# Altium PCB PCB_Project_PCB_V1I1.PcbDoc
Units mm, origin at the board's own origin, x right, y up, seen from the top; angles counter-clockwise.
Board outline 50 x 50 mm, 6 copper layers (L1, L2, L3, L4, L5, L6), stack 0.816 mm thick; 41 components, 27 nets, 119 pads, 86 vias.
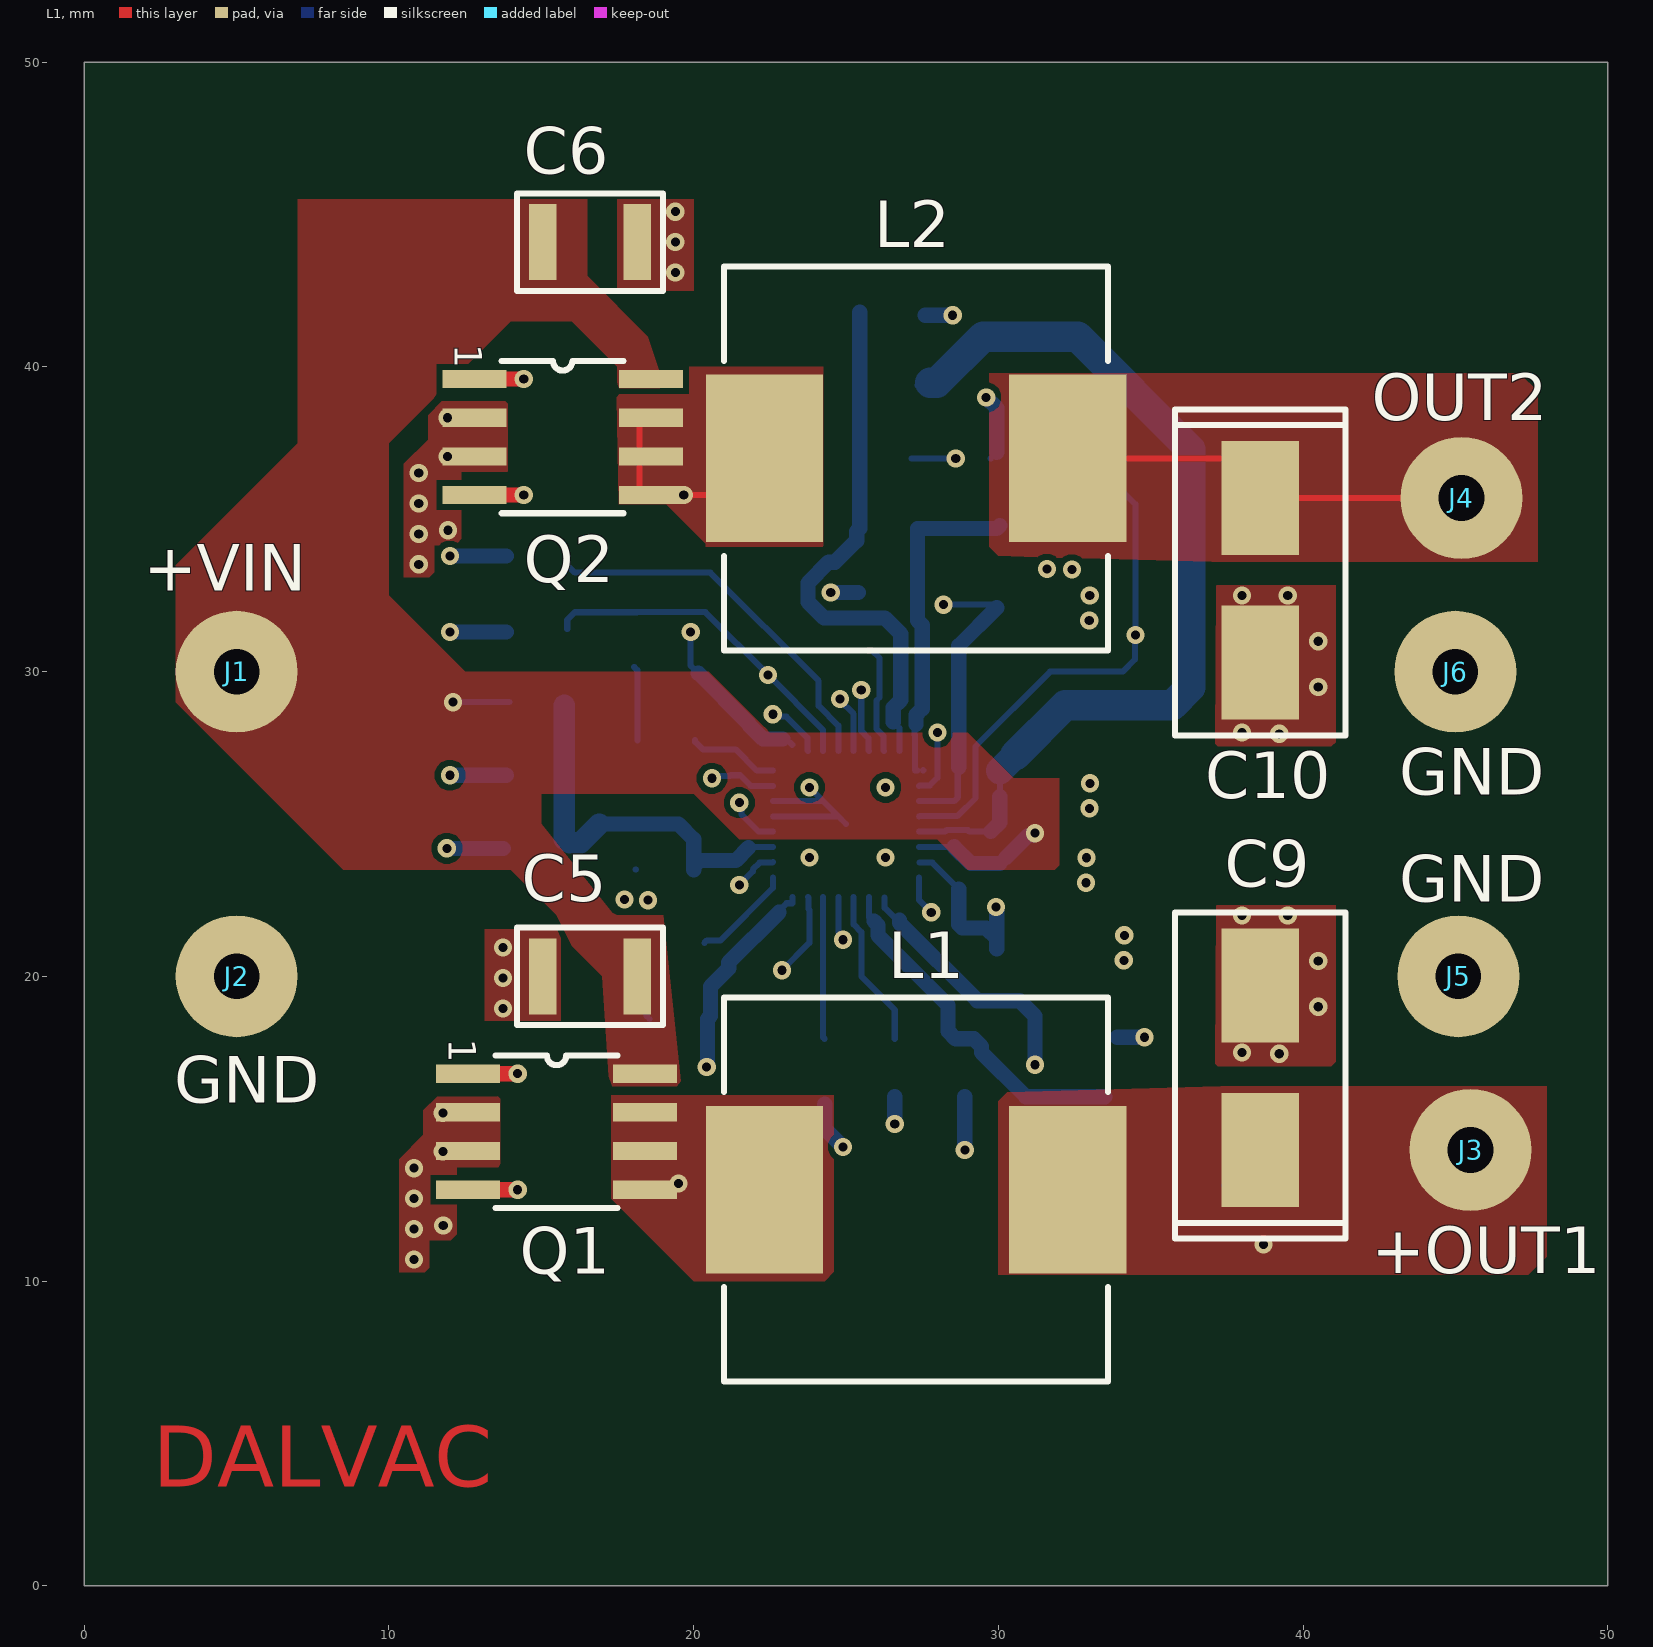
[diagram p0: L1 view]
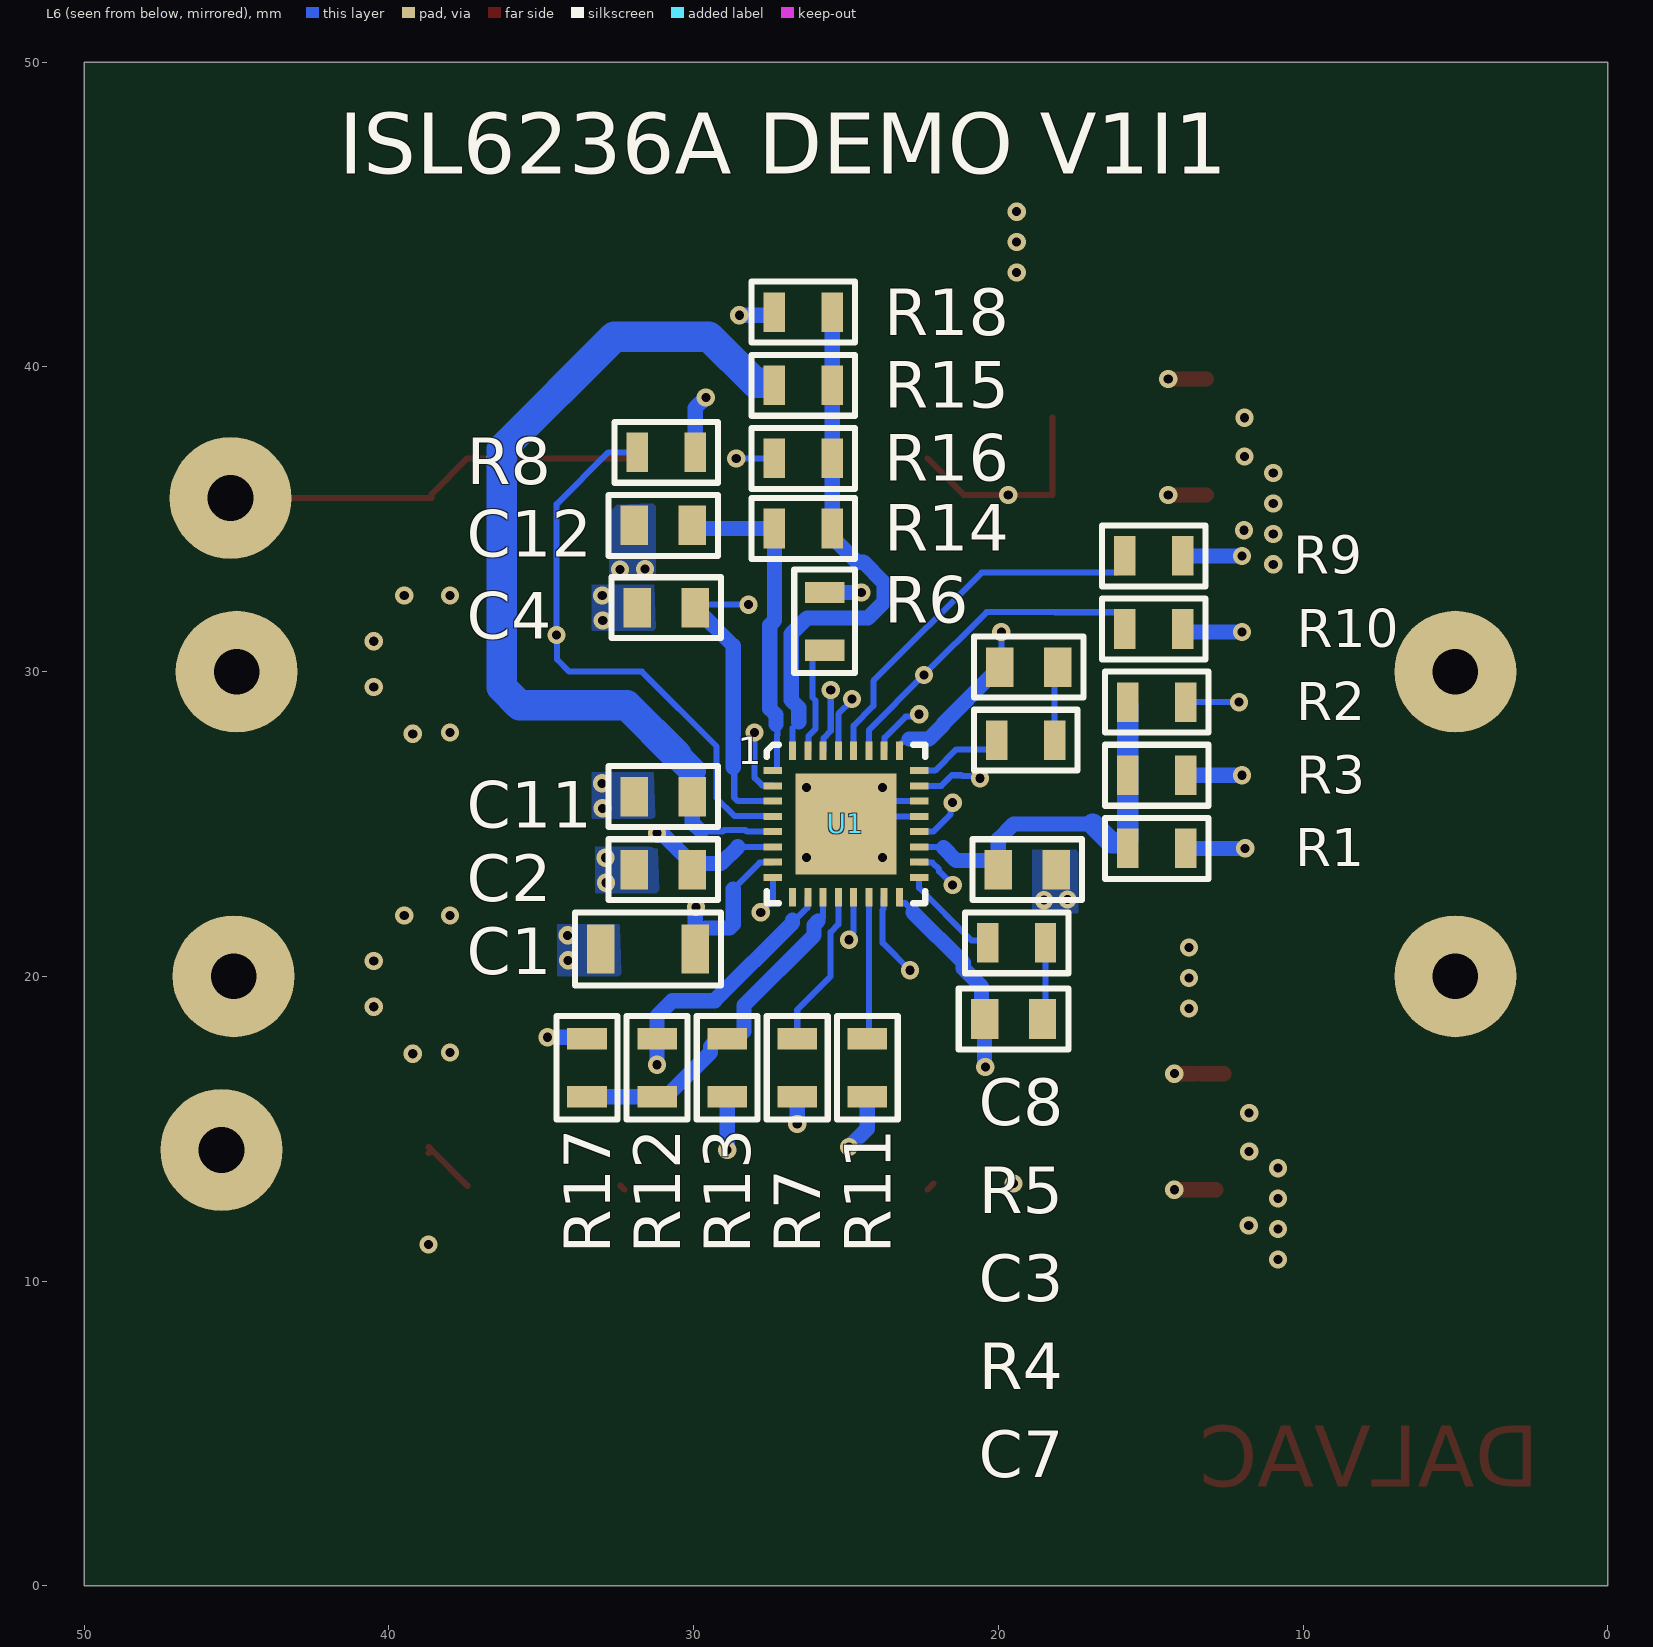
[diagram p1: L6 view, seen from below]
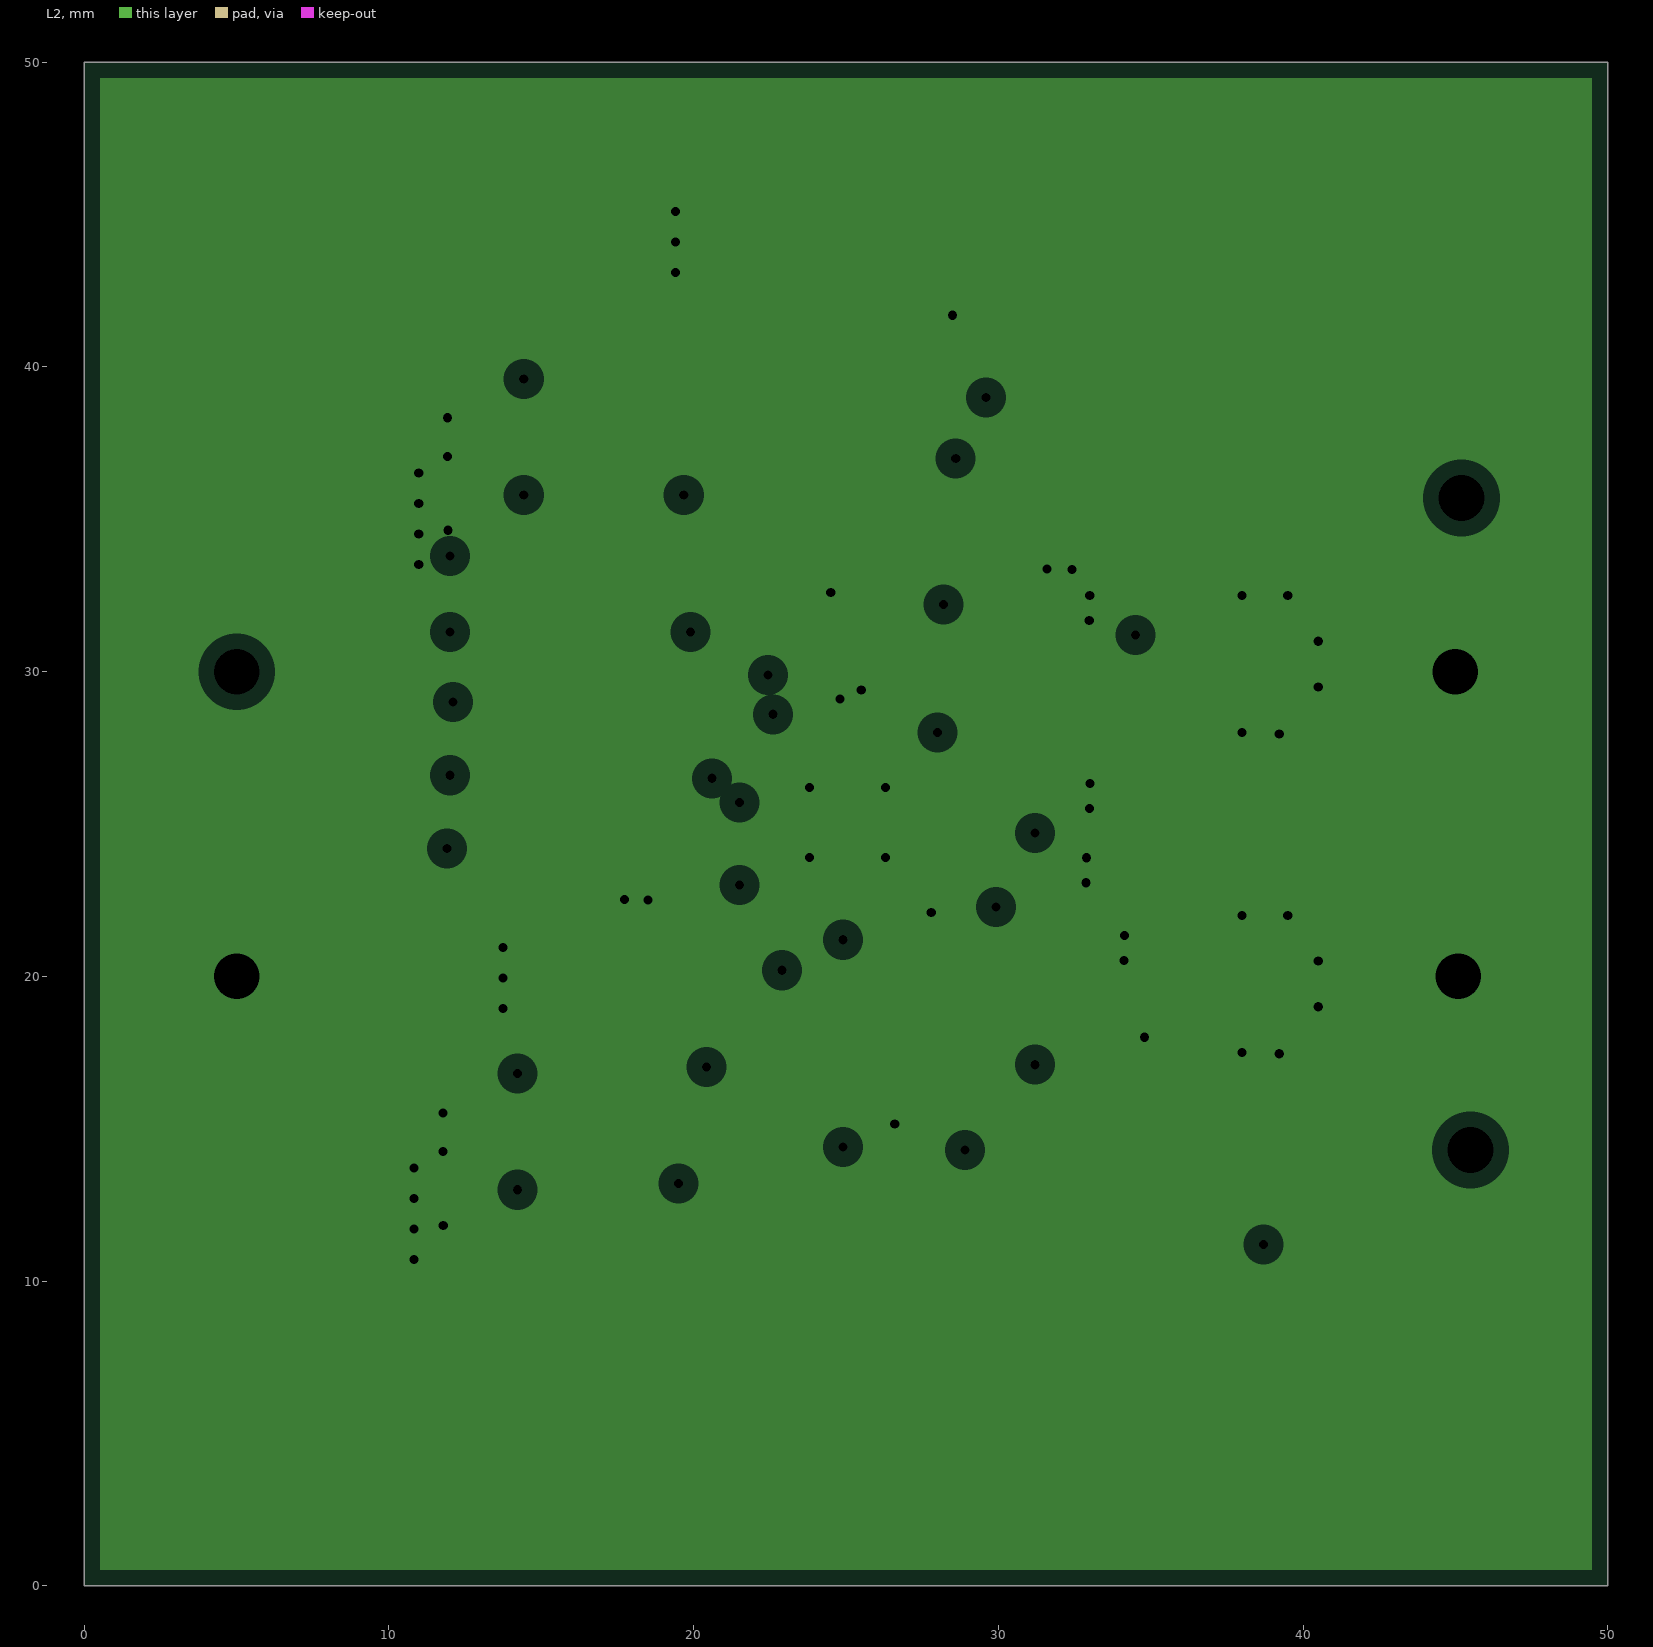
[diagram p2: L2, clearances drawn from the general rule]
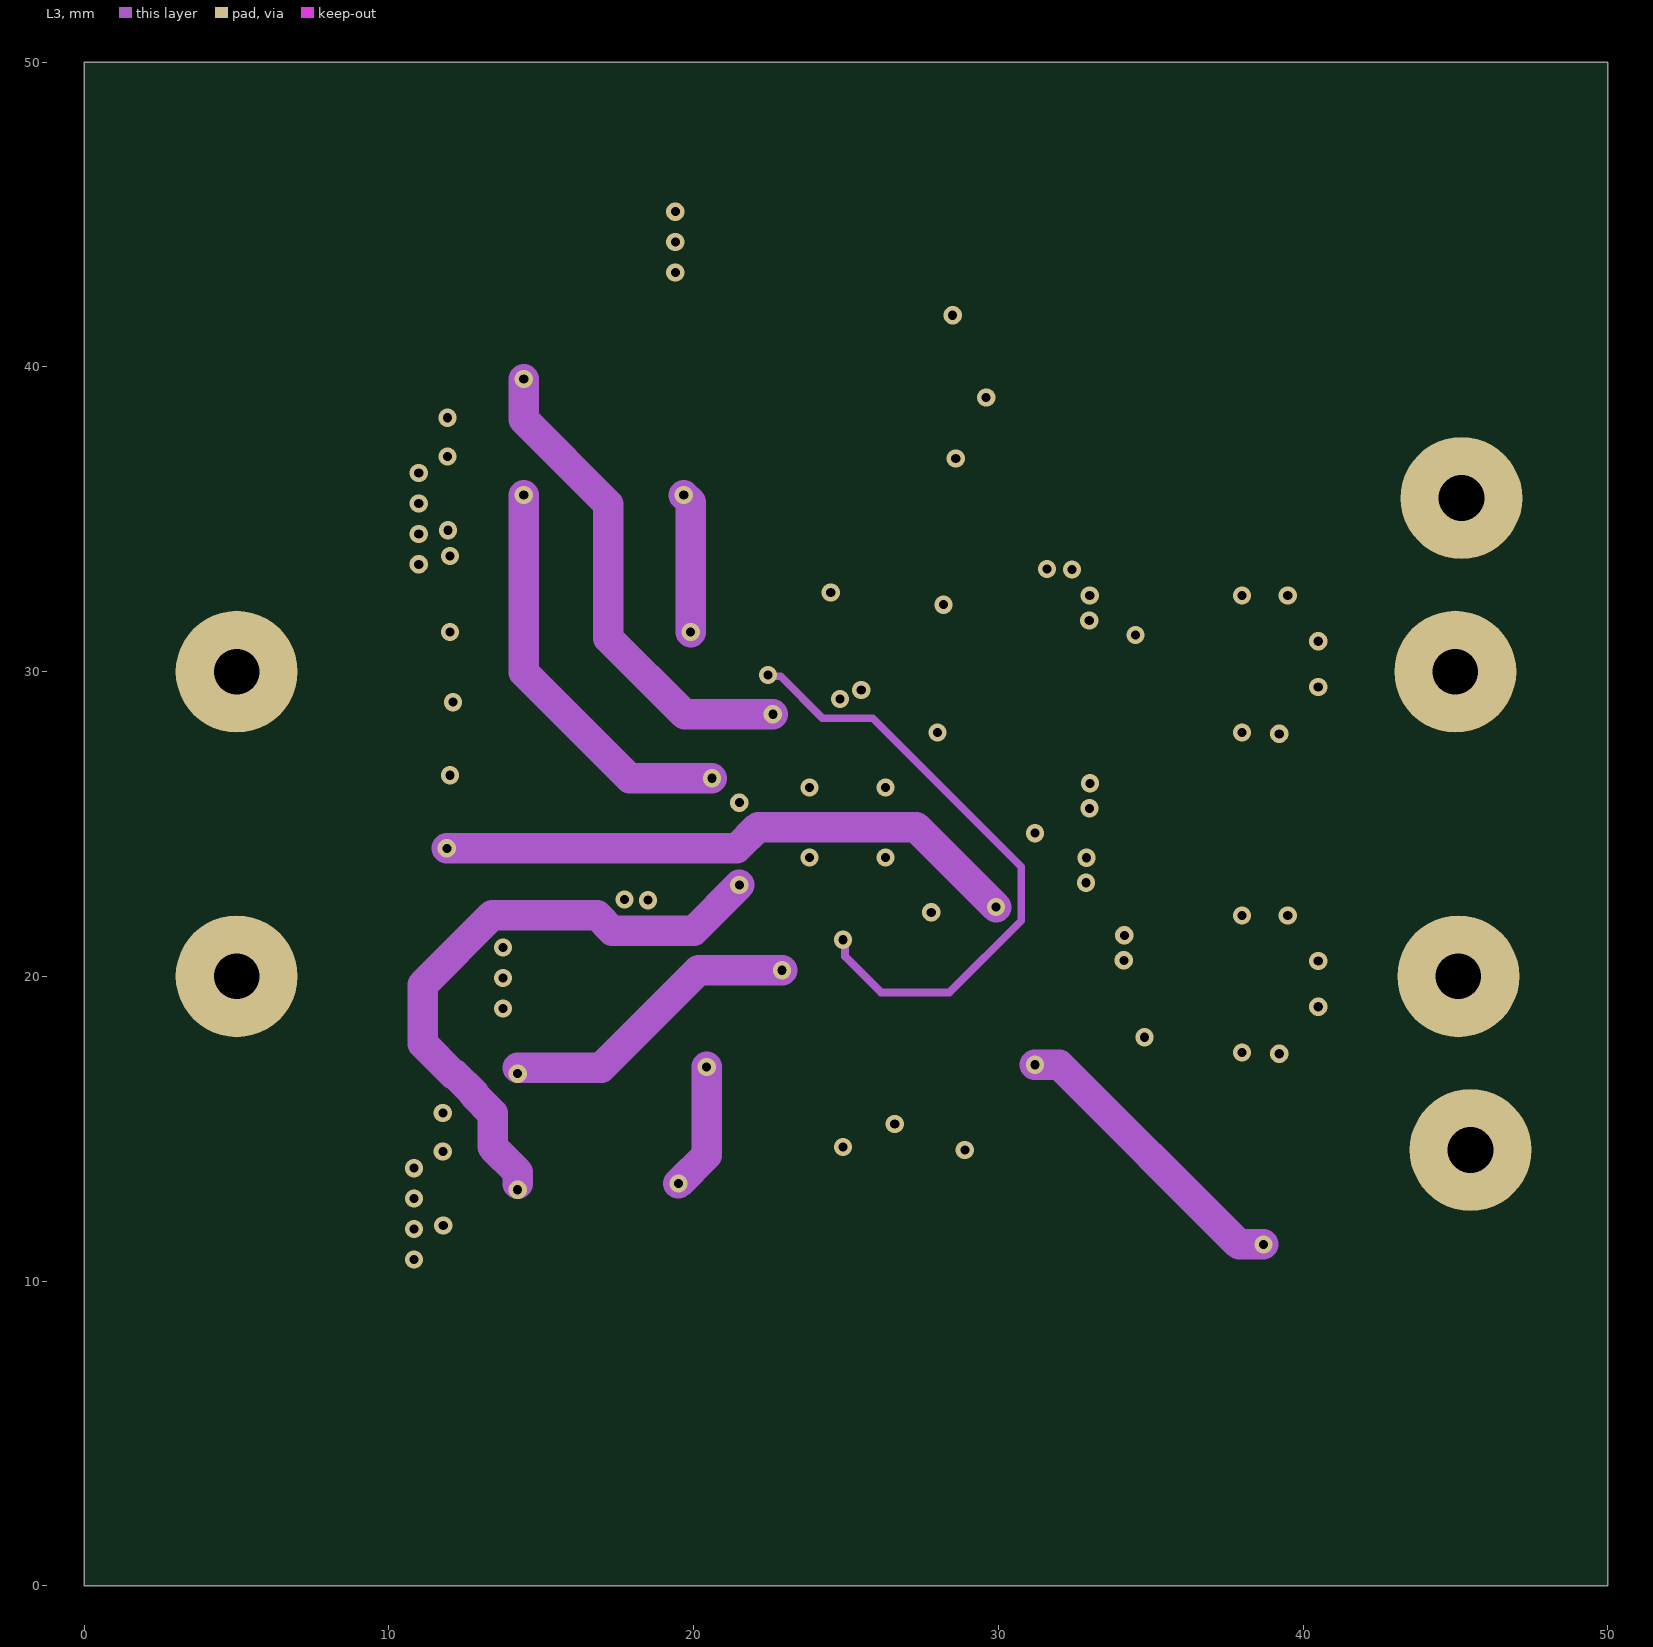
[diagram p3: L3]
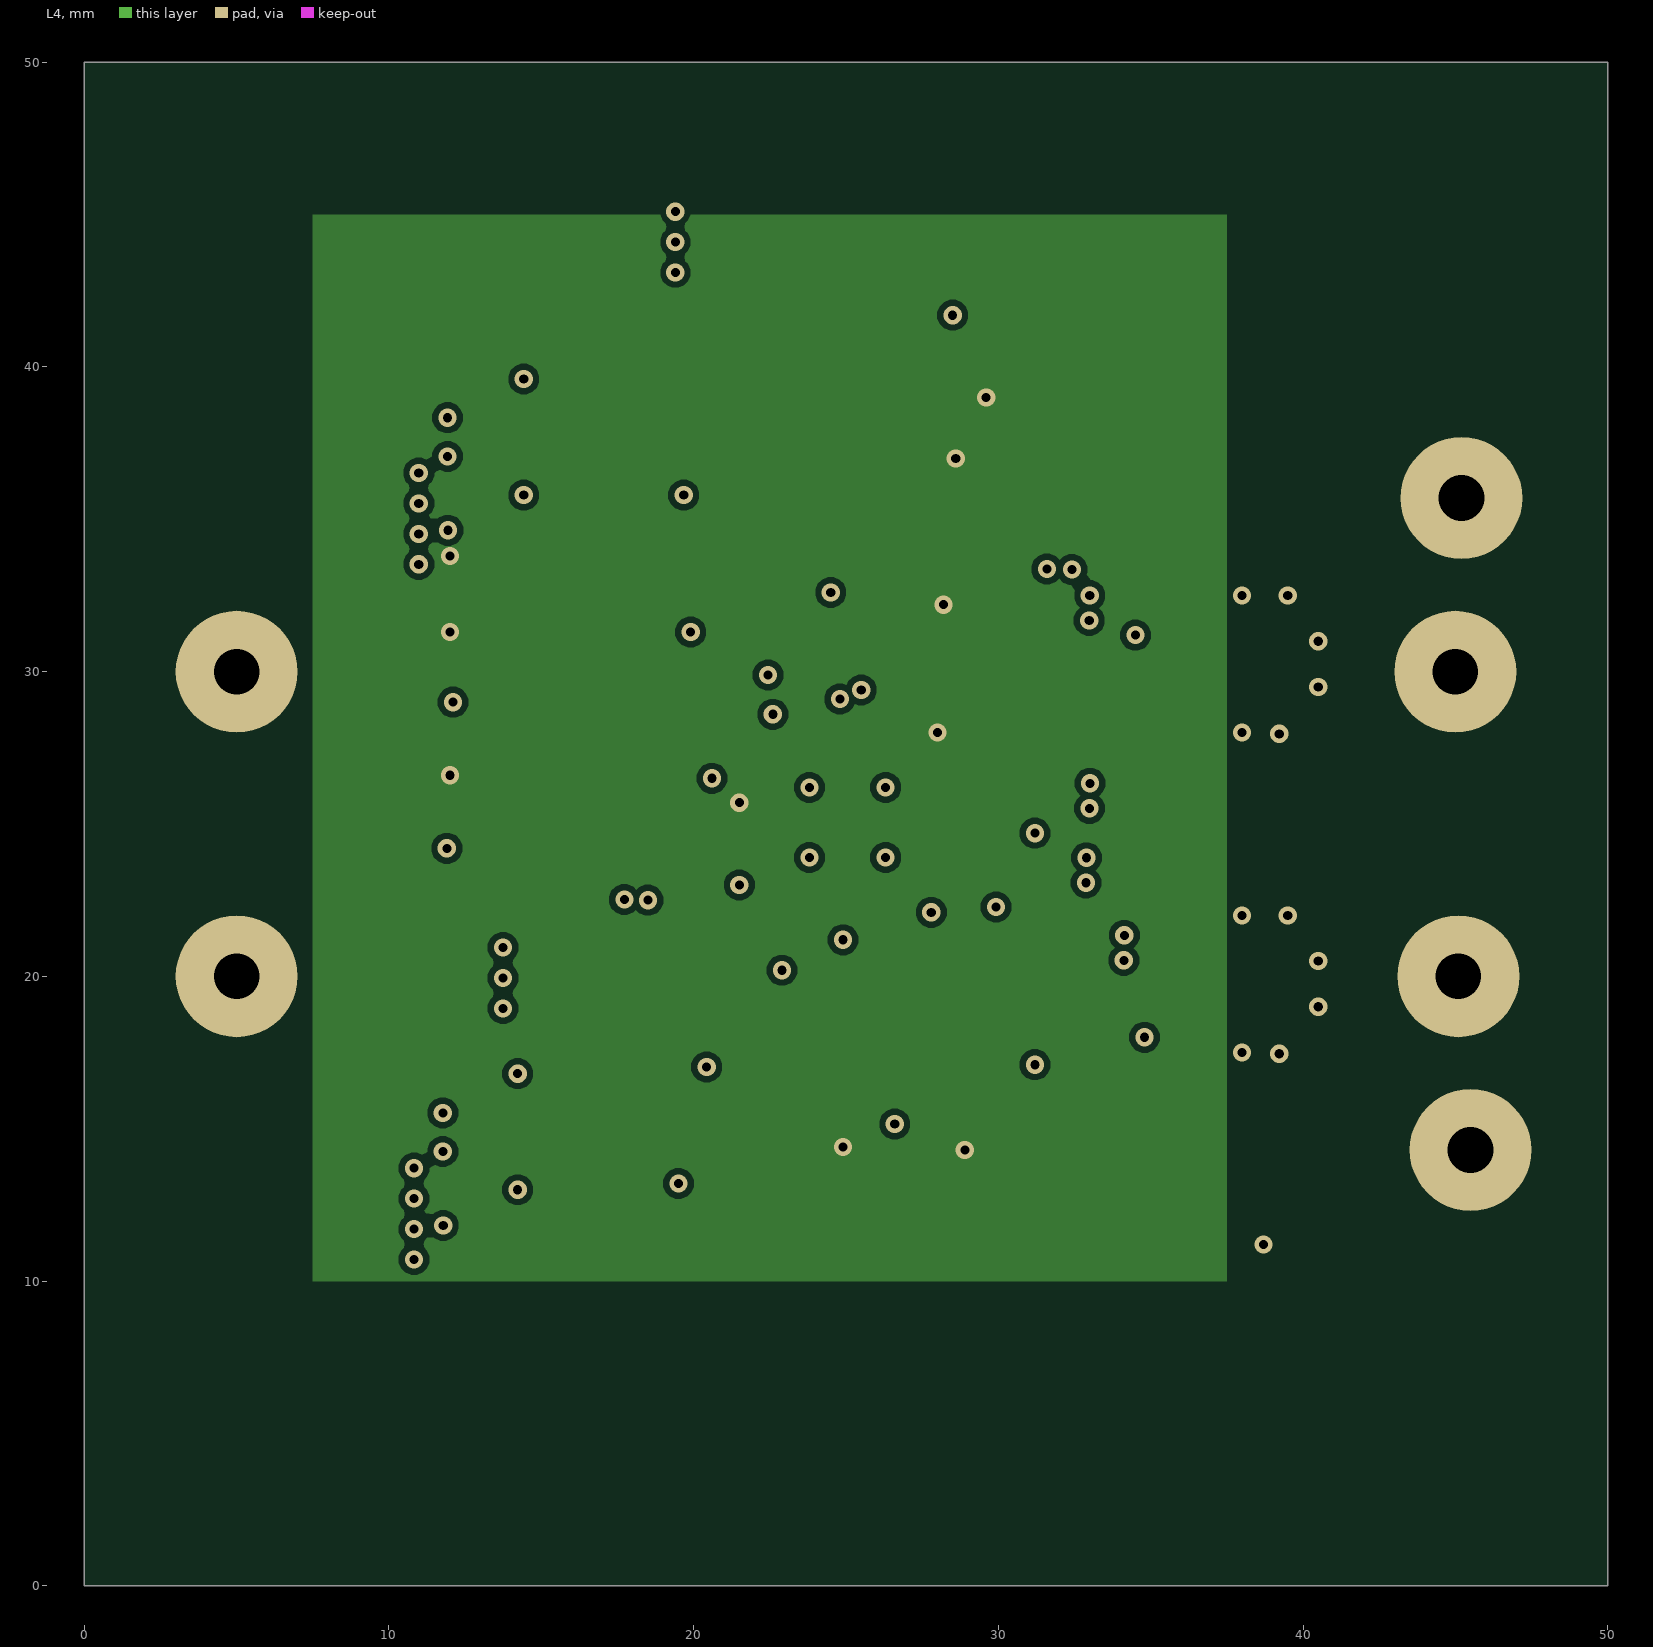
[diagram p4: L4]
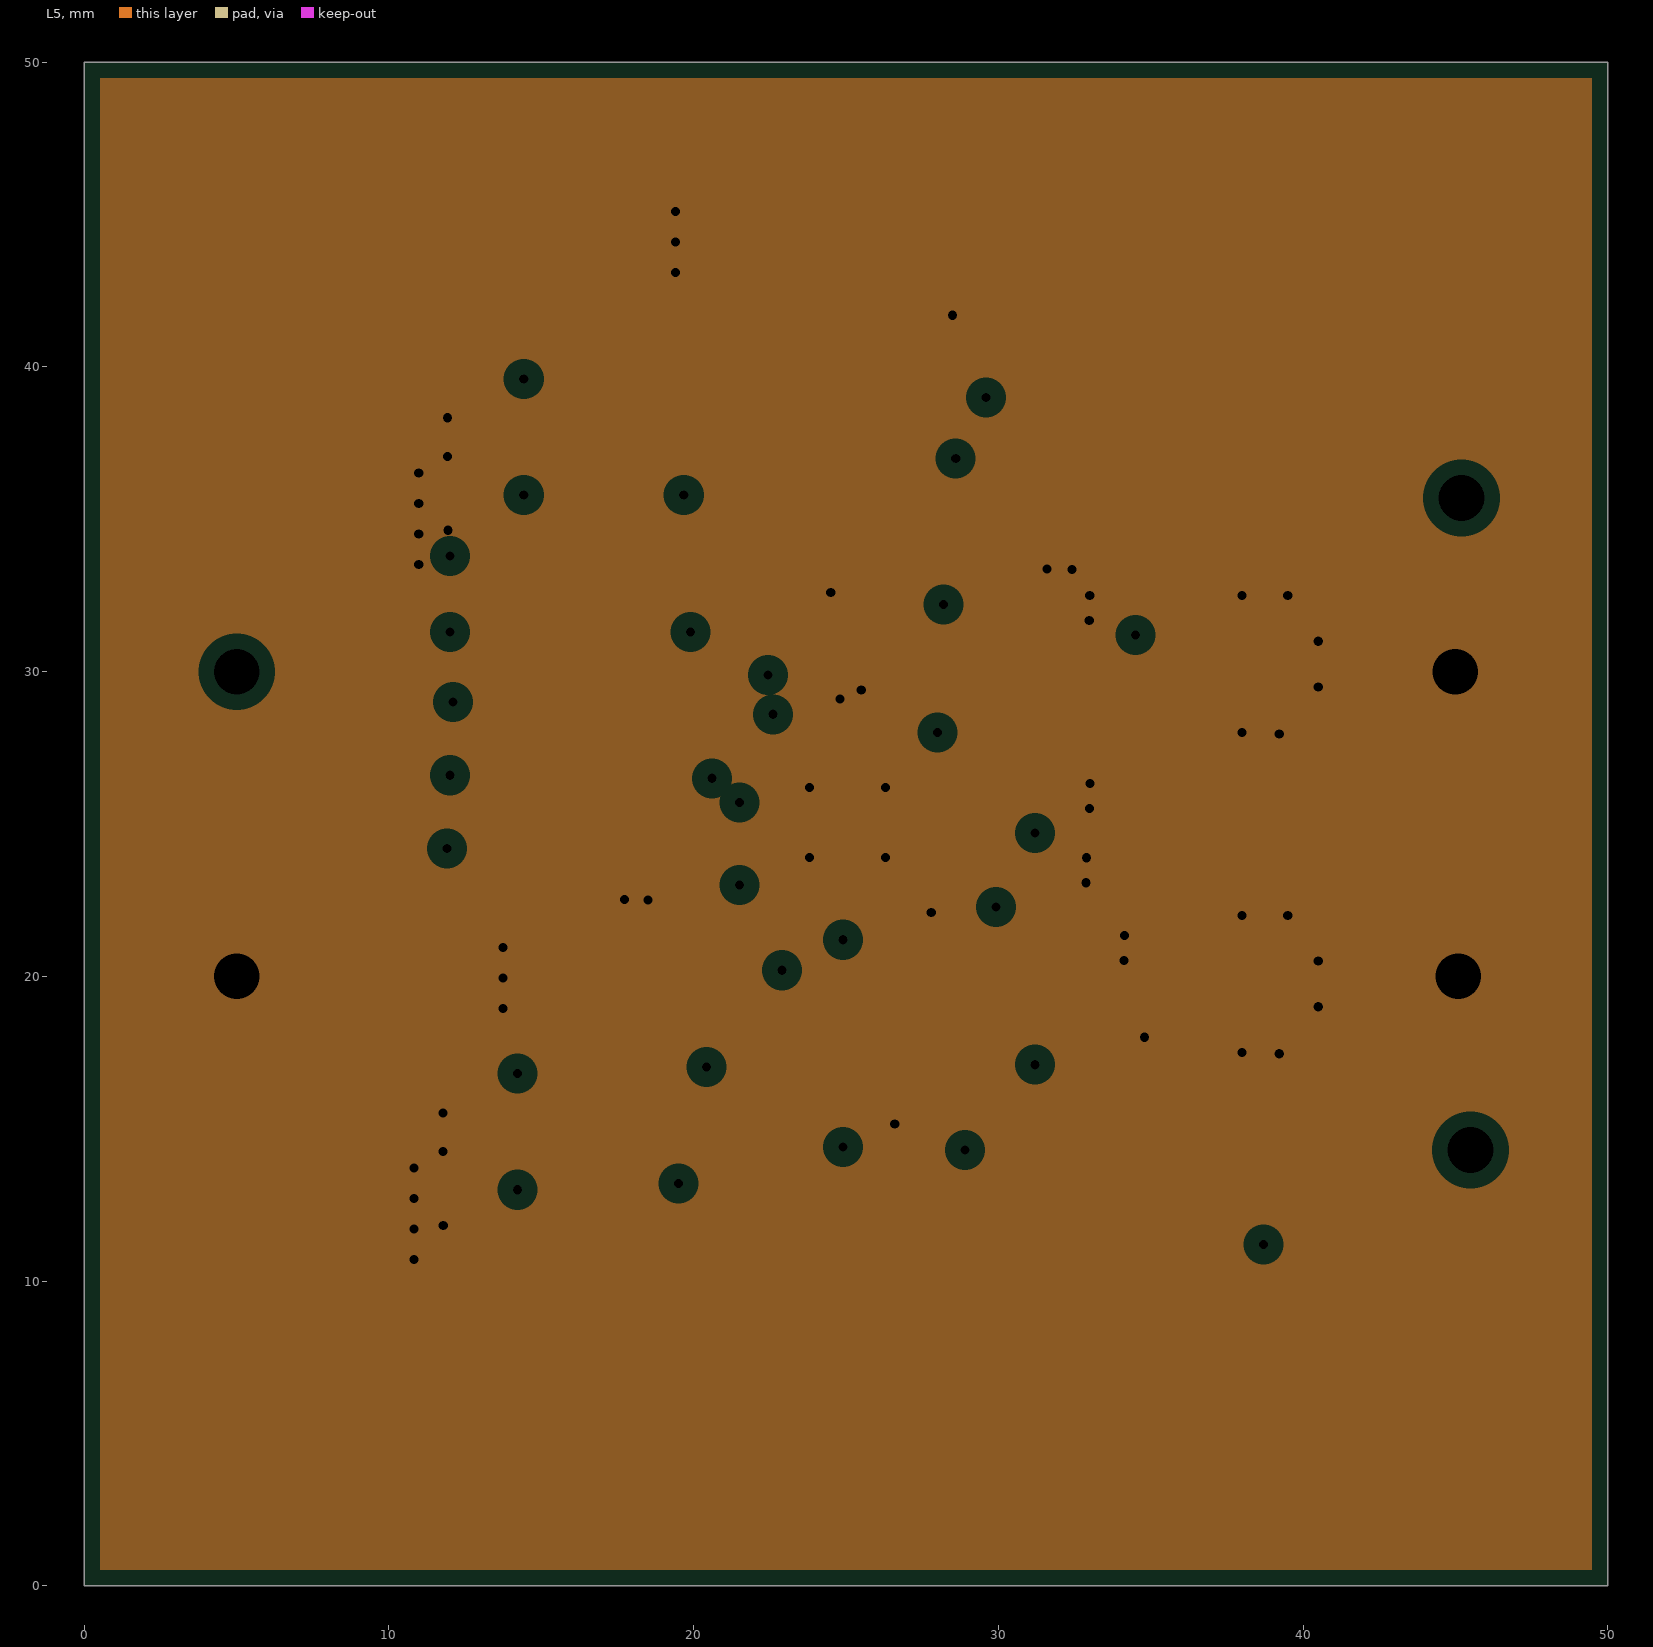
[diagram p5: L5, clearances drawn from the general rule]

## Layer stack, top to bottom
Top Solder: solder mask 0.0102, Solder Resist, Dk 3.5
L1: signal copper 0.0356
Dielectric 2: prepreg 0.0711, PP-006, Dk 4.1
L2: plane copper 0.035, net GND
Dielectric 3: prepreg 0.0711, PP-006, Dk 4.1
L3: signal copper 0.035
Dielectric 4: prepreg 0.0711, PP-006, Dk 4.1
L4: signal copper 0.035
Dielectric 5: prepreg 0.0711, PP-006, Dk 4.1
L5: plane copper 0.035, net GND
Dielectric 1: dielectric 0.32, FR-4, Dk 4.8
L6: signal copper 0.0356
Bottom Solder: solder mask 0.0102, Solder Resist, Dk 3.5

## Board outline
0,0 50,0 50,50 0,50

## Design rules (kind name [scope] priority, off if disabled: settings)
Clearance Clearance_1 [(ExistsOnLayer('L3') Or ExistsOnLayer('L4')) vs (ExistsOnLayer('L3') Or ExistsOnLayer('L4'))] p1: gap=0.2 ignorepadtopadclearanceinfootprint=FALSE sourcerule=38 cellrowname=All cellrowtype=0 cellcolname=All cellcoltype=0 innerlayers=TRUE
Clearance Clearance_2 [(ExistsOnLayer('L1') Or ExistsOnLayer('L6')) vs (ExistsOnLayer('L1') Or ExistsOnLayer('L6'))] p2: gap=0.2 ignorepadtopadclearanceinfootprint=FALSE sourcerule=38 cellrowname=All cellrowtype=0 cellcolname=All cellcoltype=0 outerlayers=TRUE
Clearance [All] p3: gap=0.254 ignorepadtopadclearanceinfootprint=FALSE ismatrix=TRUE
ComponentClearance [All] p1: gap=0.099 collisioncheckmode=3 verticalgap=0.099 showdistances=FALSE
DiffPairsRouting [All] p1: maxlimit=0.3 minlimit=0.2 mostfreqgap=0.2 toplayer_minwidth=0.381 toplayer_maxwidth=0.381 toplayer_prefwidth=0.381 midlayer1_minwidth=0.381 midlayer1_maxwidth=0.381 midlayer1_prefwidth=0.381 midlayer2_minwidth=0.381 midlayer2_maxwidth=0.381 midlayer2_prefwidth=0.381 bottomlayer_minwidth=0.381 bottomlayer_maxwidth=0.381 bottomlayer_prefwidth=0.381 maxuncoupledlength=12.7
MinimumSolderMaskSliver [All] p1: minsoldermaskwidth=0.1
PlaneClearance [All] p1: clearance=0.508
PlaneConnect [All] p1: pad.planeconnectstyle=Relief pad.reliefexpansion=0.508 pad.reliefentries=4 pad.reliefconductorwidth=1 pad.reliefairgap=0.5 via.planeconnectstyle=Direct via.reliefexpansion=0.508 via.reliefentries=4 via.reliefconductorwidth=0.254 via.reliefairgap=0.254
PolygonConnect [All] p1: connectstyle=Direct reliefconductorwidth=0.254 reliefentries=4 polygonreliefangle="90 Angle" airgapwidth=0.254
RoutingVias RoutingViaStyle_1 [All] p1: holewidth=0.3 width=0.6 viastyle="Through Hole" minholewidth=0.3 minwidth=0.6 maxholewidth=0.3 maxwidth=0.6
RoutingVias [All] p2: holewidth=0.711 width=1.27 viastyle="Through Hole" minholewidth=0.711 minwidth=1.27 maxholewidth=0.711 maxwidth=1.27
SilkToSolderMaskClearance [IsPad] p1: minsilkscreentomaskgap=0.1 clearancetoexposedcopper=TRUE
SolderMaskExpansion [All] p1: expansion=0.102 istentingtop=FALSE
Width MaxMinWidth_2 [InNet('UGATE2')] p1: maxlimit=10 minlimit=0.2 preferedwidth=0.2 minimp=50.000000 maximp=50.000000 favimp=50.000000
Width [All] p2: maxlimit=10 minlimit=0.2 preferedwidth=0.2 minimp=50.000000 maximp=50.000000 favimp=50.000000
24 further rules are at their usual default settings.

## Components (designator, comment, footprint, x,y, rotation, side; value= is the part's Value field where it differs from the comment)
C1 "4.7uF, 50V" C1206 31.5,20.9 r180 bottom value=4.7uF
C2 "1uF, 50V" C0805 31,23.5 r180 bottom value=1uF
C3 "1uF, 50V" C0805 19.05,23.5 r0 bottom value=1uF
C4 "1uF, 50V" C0805 30.9,32.1 r180 bottom value=1uF
C5 "10uF, 35V" C1210 16.6,20 r0 top value=10uF
C6 "10uF, 35V" C1210 16.6,44.1 r180 top value=10uF
C7 "100nF" C0805 19.5,18.6 r180 bottom
C8 "220nF" C0805 19,30.15 r0 bottom
C9 "330uF, 10V" 7343-43 38.6,17 r90 top value=330uF
C10 "330uF, 10V" 7343-43 38.6,33 r270 top value=330uF
C11 "10nF" C0805 31,25.9 r0 bottom
C12 "100nF" C0805 31,34.8 r0 bottom
J1 "4MMx1.5MM" PAD_WITH_HOLE_4MMx1MM5 5,30 r0 top
J2 "4MMx1.5MM" PAD_WITH_HOLE_4MMx1MM5 5,20 r0 top
J3 "4MMx1.5MM" PAD_WITH_HOLE_4MMx1MM5 45.5,14.3 r0 top
J4 "4MMx1.5MM" PAD_WITH_HOLE_4MMx1MM5 45.2,35.7 r0 top
J5 "4MMx1.5MM" PAD_WITH_HOLE_4MMx1MM5 45.1,20 r0 top
J6 "4MMx1.5MM" PAD_WITH_HOLE_4MMx1MM5 45,30 r0 top
L1 "3.3uH, DR125-3R3-R" DR125 27.3,13 r180 top
L2 "2.2uH" DR125 27.3,37 r0 top
Q1 "SI4816BDY-T1-E3" SO-8 15.5,14.9 r0 top
Q2 "SI4816BDY-T1-E3" SO-8 15.7,37.7 r0 top
R1 "0R" R0805 14.8,24.2 r180 bottom
R2 "0R" R0805 14.8,29 r0 bottom
R3 "10R" R0805 14.8,26.6 r180 bottom
R4 "1R" R0805 19.4,21.1 r0 bottom
R5 "1R" R0805 19.1,27.75 r180 bottom
R6 "200K" R0805 25.7,31.65 r90 bottom value=200kR
R7 "200K" R0805 26.6,17 r270 bottom value=200kR
R8 "10k" R0805 30.9,37.2 r180 bottom value=10kR
R9 "200K" R0805 14.9,33.8 r180 bottom value=200kR
R10 "200K" R0805 14.9,31.4 r180 bottom value=200kR
R11 "10k" R0805 24.3,17 r270 bottom value=10kR
R12 "DNP" R0805 31.2,17 r90 bottom
R13 "0R" R0805 28.9,17 r270 bottom
R14 "DNP" R0805 26.4,34.7 r0 bottom
R15 "0R" R0805 26.4,39.4 r0 bottom
R16 "DNP" R0805 26.4,37 r0 bottom
R17 "DNP" R0805 33.5,17 r270 bottom
R18 "DNP" R0805 26.4,41.8 r180 bottom
U1 "ISL6236AIRZ" L32.5x5B 25,25 r180 bottom

## Footprints (in the part's own frame and the unit in brackets; to place one, negate y for a bottom-side part, rotate by r counter-clockwise, add the part's x,y. Pads: shape width x height; smd on the part's side, far side on the other; paste and mask are expansions set on the pad)
7343-43 [mm]
  rect 3.75x2.55 smd: 1(-2.7,0) 2(2.7,0)
  silkscreen extent -5.6,-2.8 5.1,2.8
C0805 [mm]
  rect 0.9x1.3 smd: 1(-0.95,0) 2(0.95,0)
  silkscreen extent -1.8,-1 1.8,1
C1206 [mm]
  rect 0.9x1.6 smd: 1(-1.55,0) 2(1.55,0)
  silkscreen extent -2.4,-1.2 2.4,1.2
C1210 [mm]
  rect 0.9x2.5 smd: 1(-1.55,0) 2(1.55,0)
  silkscreen extent -2.4,-1.6 2.4,1.6
DR125 [mm]
  rect 3.85x5.5 smd: 1(-4.975,0) 2(4.975,0)
  silkscreen extent -6.3,-6.3 6.3,6.3
L32.5x5B [mm]
  rect 0.6x0.23 smd mask+0.051: 1(-2.4,1.75) 2(-2.4,1.25) 3(-2.4,0.75) 4(-2.4,0.25) 5(-2.4,-0.25) 6(-2.4,-0.75) 7(-2.4,-1.25) 8(-2.4,-1.75) 17(2.4,-1.75) 18(2.4,-1.25) 19(2.4,-0.75) 20(2.4,-0.25) 21(2.4,0.25) 22(2.4,0.75) 23(2.4,1.25) 24(2.4,1.75)
  rect 0.23x0.6 smd mask+0.051: 9(-1.75,-2.4) 10(-1.25,-2.4) 11(-0.75,-2.4) 12(-0.25,-2.4) 13(0.25,-2.4) 14(0.75,-2.4) 15(1.25,-2.4) 16(1.75,-2.4) 25(1.75,2.4) 26(1.25,2.4) 27(0.75,2.4) 28(0.25,2.4) 29(-0.25,2.4) 30(-0.75,2.4) 31(-1.25,2.4) 32(-1.75,2.4)
  rect 3.3x3.3 smd mask+0.051: 33(0,0)
  silkscreen extent -2.6,-2.6 2.6,2.6
PAD_WITH_HOLE_4MMx1MM5 [mm]
  round 4 hole 1.5: 1(0,0)
R0805 [mm]
  rect 0.7x1.3 smd: 1(-0.95,0) 2(0.95,0)
  silkscreen extent -1.7,-1 1.7,1
SO-8 [mm]
  rect 2.1x0.6 smd: 1(-2.9,1.905) 2(-2.9,0.635) 3(-2.9,-0.635) 4(-2.9,-1.905) 5(2.9,-1.905) 6(2.9,-0.635) 7(2.9,0.635) 8(2.9,1.905)
  silkscreen extent -2,-2.5 2,2.5

## Part data
C1: library part C3216X5R1H475K160AB, "Ceramic Capacitor, Multilayer, Ceramic, 50V, 10% +Tol, 10% -Tol, X5R, 15% TC, 4.7uF, Surface Mount, 1206", Capacitor Type=Ceramic, Case/Package=1206, Manufacturer=TDK, Max Operating Temperature=85°C, Min Operating Temperature=-55°C, Package Shape=Rectangular, Package Style=SMTMeter, Rated DC Voltage (URdc)=50V, Supplier Part Number=445-5994-1-ND, Temperature Characteristics Code=X5R, Tolerance  (fill in as +-)=10%, Category="Ceramic Capacitors", ComponentLink1Description=https://datasheet.ciiva.com:443/pdfs/VipMasterIC/IC/TDKC/TDKC-S-A0008796792/TDKC-S-A0008796792-1.pdf?src-supplier=IHS+Markit, ComponentLink1URL=https://datasheet.ciiva.com:443/pdfs/VipMasterIC/IC/TDKC/TDKC-S-A0008796792/TDKC-S-A0008796792-1.pdf?src-supplier=IHS+Markit, ComponentLink2Description=https://datasheet.ciiva.com/24216/c3216x5r1h475k160ab-265269-24216325.pdf?src-supplier=Mouser, ComponentLink2URL=https://datasheet.ciiva.com/24216/c3216x5r1h475k160ab-265269-24216325.pdf?src-supplier=Mouser, ComponentLink3Description=https://datasheet.ciiva.com/6286/tdkmlcccaprange-6286230.pdf?src-supplier=Digikey, ComponentLink3URL=https://datasheet.ciiva.com/6286/tdkmlcccaprange-6286230.pdf?src-supplier=Digikey, ComponentLink4Description=https://datasheet.ciiva.com/6286/tdkmlcccaprange-6286233.pdf?src-supplier=Digikey, ComponentLink4URL=https://datasheet.ciiva.com/6286/tdkmlcccaprange-6286233.pdf?src-supplier=Digikey, ComponentLink5Description=https://datasheet.ciiva.com/6286/tdkmlcccaprange-6286236.pdf?src-supplier=Digikey, ComponentLink5URL=https://datasheet.ciiva.com/6286/tdkmlcccaprange-6286236.pdf?src-supplier=Digikey, Dielectric Material=Ceramic, Height=1.6mm, JESD-609 Code=e3, Length=3.2mm, Manufacturer Part Number=C3216X5R1H475K160AB, Mounting Technology="Surface Mount", Multilayer=Yes, Packaging="Tape and Reel", Pins=2, Pricing="1=0.73, 10=0.514, 50=0.4326, 100=0.3523, 500=0.29356, 1000=0.2472 (USD)", Reach SVHC Compliant=Yes, RoHS=Yes, RoHS Compliant=Yes, Stock=61185, Supplier=Digikey, Terminal Finish=Nickel, Termination=Wraparound, Tolerance (fill in as +-)=10%, Width=1.6mm
C2 C3 C4: library part "C0805C105K5RACTU (2)", "Ceramic Capacitor, Multilayer, Ceramic, 50V, 10% +Tol, 10% -Tol, X7R, 15% TC, 1uF, Surface Mount, 0805", Capacitor Type=Ceramic, Case/Package=0805, Manufacturer=KEMET, Manufacturer Part Number=C0805C105K5RACTU, Max Operating Temperature=125°C, Min Operating Temperature=-55°C, Package Shape=Rectangular, Package Style=SMTMeter, Rated DC Voltage (URdc)=50V, Supplier Part Number=399-C0805C105K5RAC7800CT-ND, Temperature Characteristics Code=X7R, Tolerance  (fill in as +-)=10%, Category="Ceramic Capacitors", ComponentLink1Description=https://datasheet.ciiva.com:443/pdfs/VipMasterIC/IC/KEME/KEME-S-A0008991654/KEME-S-A0008991654-1.pdf?src-supplier=IHS+Markit, ComponentLink1URL=https://datasheet.ciiva.com:443/pdfs/VipMasterIC/IC/KEME/KEME-S-A0008991654/KEME-S-A0008991654-1.pdf?src-supplier=IHS+Markit, ComponentLink2Description=https://datasheet.ciiva.com/5408/kem-c1002-x7r-smd-5408569.pdf?src-supplier=Mouser, ComponentLink2URL=https://datasheet.ciiva.com/5408/kem-c1002-x7r-smd-5408569.pdf?src-supplier=Mouser, Dielectric Material=Ceramic, Height=1.25mm, JESD-609 Code=e3, Length=2mm, Mounting Technology="Surface Mount", Multilayer=Yes, Packaging="Tape and Reel", Pins=2, Pricing="1=0.35, 10=0.231, 50=0.1704, 100=0.1387, 500=0.10954, 1000=0.0925 (USD)", Reach SVHC Compliant=Yes, RoHS=Yes, RoHS Compliant=Yes, Stock=8085, Supplier=Digikey, Terminal Finish=Nickel, Termination=Wraparound, Tolerance (fill in as +-)=10%, Width=1.25mm
C5 C6: library part C1210C106K6PACTU, "Ceramic Capacitor, Multilayer, Ceramic, 35V, 10% +Tol, 10% -Tol, X5R, 15% TC, 10uF, Surface Mount, 1210", Capacitor Type=Ceramic, Case/Package=1210, Manufacturer=KEMET, Max Operating Temperature=85°C, Min Operating Temperature=-55°C, Package Shape=Rectangular, Rated DC Voltage (URdc)=35V, Supplier Part Number=399-12070-6-ND, Temperature Characteristics Code=X5R, Tolerance  (fill in as +-)=10%, Category="Ceramic Capacitors", ComponentLink1Description=https://search.kemet.com:443/component-edge/download/specsheet/C1210C106K6PACTU.pdf?src-supplier=IHS+Markit, ComponentLink1URL=https://search.kemet.com:443/component-edge/download/specsheet/C1210C106K6PACTU.pdf?src-supplier=IHS+Markit, ComponentLink2Description=http://www.farnell.com/datasheets/2741192.pdf?src-supplier=Farnell, ComponentLink2URL=http://www.farnell.com/datasheets/2741192.pdf?src-supplier=Farnell, ComponentLink3Description=http://www.alliedelec.com/m/d/f3c02ddb98afa3dd1adcb801109671e9.pdf?src-supplier=Allied+Electronics, ComponentLink3URL=http://www.alliedelec.com/m/d/f3c02ddb98afa3dd1adcb801109671e9.pdf?src-supplier=Allied+Electronics, ComponentLink4Description=https://datasheet.octopart.com/C1210C106K6PACTU-KEMET-datasheet-83562113.pdf?src-supplier=Newark, ComponentLink4URL=https://datasheet.octopart.com/C1210C106K6PACTU-KEMET-datasheet-83562113.pdf?src-supplier=Newark, ComponentLink5Description=https://api.kemet.com/component-edge/download/datasheet/C1210C106K6PAC7800.pdf?src-supplier=Digikey, ComponentLink5URL=https://api.kemet.com/component-edge/download/datasheet/C1210C106K6PAC7800.pdf?src-supplier=Digikey, ComponentLink6Description=http://www.kemet.com/docfinder?Partnumber=C1210C106K6PAC7800&src-supplier=Digikey, ComponentLink6URL=http://www.kemet.com/docfinder?Partnumber=C1210C106K6PAC7800&src-supplier=Digikey, ComponentLink7Description=http://www.farnell.com/datasheets/2741192.pdf?src-supplier=Newark, ComponentLink7URL=http://www.farnell.com/datasheets/2741192.pdf?src-supplier=Newark, ComponentLink8Description=https://datasheet.octopart.com/C1210C106K6PACTU-KEMET-datasheet-86448939.pdf?src-supplier=Farnell, ComponentLink8URL=https://datasheet.octopart.com/C1210C106K6PACTU-KEMET-datasheet-86448939.pdf?src-supplier=Farnell, Dielectric Material=Ceramic, JESD-609 Code=e3, Manufacturer Part Number=C1210C106K6PACTU, Mounting Technology="Surface Mount", Multilayer=Yes, Packaging="Tape and Reel", Pins=2, Pricing="1=0.72, 10=0.503, 50=0.424, 100=0.3452, 500=0.28766 (USD)", Reach SVHC Compliant=Yes, RoHS=Yes, RoHS Compliant=Yes, Stock=28075, Supplier=Digikey, Terminal Finish=Nickel, Termination=Wraparound, Tolerance (fill in as +-)=10%
C7 C12: library part C0805C104K5RAC7800, "Multilayer Ceramic Capacitor, 0.1 uF, 50 V, ± 10%, X7R, 0805 [2012 Metric]", Manufacturer=KEMET, Supplier Part Number=399-C0805C104K5RAC7800CT-ND, ComponentLink1Description=https://datasheet.octopart.com/C0805C104K5RACTU-KEMET-datasheet-101576148.pdf?src-supplier=Farnell, ComponentLink1URL=https://datasheet.octopart.com/C0805C104K5RACTU-KEMET-datasheet-101576148.pdf?src-supplier=Farnell, ComponentLink2Description=https://datasheet.octopart.com/C0805C104K5RAC-TU-Kemet-datasheet-32036385.pdf?src-supplier=Element14, ComponentLink2URL=https://datasheet.octopart.com/C0805C104K5RAC-TU-Kemet-datasheet-32036385.pdf?src-supplier=Element14, Manufacturer Part Number=C0805C104K5RAC7800, Pricing="1=0.14, 10=0.091, 50=0.0546, 100=0.043, 500=0.03172, 1000=0.02627 (USD)", RoHS=No, Stock=2139377, Supplier=Digikey
C8: library part C0805C224K5RACTU, "Ceramic Capacitor, Multilayer, Ceramic, 50V, 10% +Tol, 10% -Tol, X7R, 15% TC, 0.22uF, Surface Mount, 0805", Capacitor Type=Ceramic, Case/Package=0805, Manufacturer=KEMET, Max Operating Temperature=125°C, Min Operating Temperature=-55°C, Package Shape=Rectangular, Package Style=SMTMeter, Rated DC Voltage (URdc)=50V, Supplier Part Number=399-C0805C224K5RACTUCT-ND, Temperature Characteristics Code=X7R, Tolerance  (fill in as +-)=10%, Category="Ceramic Capacitors", ComponentLink1Description=https://datasheet.ciiva.com:443/pdfs/VipMasterIC/IC/KEME/KEME-S-A0008991654/KEME-S-A0008991654-1.pdf?src-supplier=IHS+Markit, ComponentLink1URL=https://datasheet.ciiva.com:443/pdfs/VipMasterIC/IC/KEME/KEME-S-A0008991654/KEME-S-A0008991654-1.pdf?src-supplier=IHS+Markit, ComponentLink2Description=https://datasheet.ciiva.com/7842/kem-c1002-x7r-smd-7842582.pdf?src-supplier=Element14, ComponentLink2URL=https://datasheet.ciiva.com/7842/kem-c1002-x7r-smd-7842582.pdf?src-supplier=Element14, ComponentLink3Description=https://datasheet.ciiva.com/28682/1851736-28682316.pdf?src-supplier=Element14, ComponentLink3URL=https://datasheet.ciiva.com/28682/1851736-28682316.pdf?src-supplier=Element14, Dielectric Material=Ceramic, Height=1.25mm, JESD-609 Code=e3, Length=2mm, Manufacturer Part Number=C0805C224K5RACTU, Mounting Technology="Surface Mount", Multilayer=Yes, Packaging="Tape and Reel", Pins=2, Pricing="1=0.16, 10=0.106, 50=0.063, 100=0.0496, 500=0.03666, 1000=0.03035 (USD)", Reach SVHC Compliant=Yes, RoHS=Yes, RoHS Compliant=Yes, Stock=7210, Supplier=Digikey, Terminal Finish=Nickel, Termination=Wraparound, Tolerance (fill in as +-)=10%, Width=1.25mm
C9 C10: library part T530X337M010ATE004, "Tantalum Capacitor, Polarized, Tantalum (solid Polymer), 10V, 20% +Tol, 20% -Tol, 330uF, Surface Mount, 2917", Capacitor Type=Tantalum, Case/Package=2917, Dielectric Material=Polymer, ESR (Equivalent Series Resistance)=4mR, Leakage Current=330uA, Manufacturer=KEMET, Max Operating Temperature=125°C, Min Operating Temperature=-55°C, Package Shape=Rectangular, Package Style=SMTMeter, Rated DC Voltage (URdc)=10V, Ripple Current=8.2A, Supplier Part Number=399-10378-1-ND, Tolerance  (fill in as +-)=20%, Category="Polymer Capacitors", ComponentLink1Description=https://datasheet.ciiva.com:443/pdfs/VipMasterIC/IC/KEME/KEME-S-A0009782340/KEME-S-A0009782340-1.pdf?src-supplier=IHS+Markit, ComponentLink1URL=https://datasheet.ciiva.com:443/pdfs/VipMasterIC/IC/KEME/KEME-S-A0009782340/KEME-S-A0009782340-1.pdf?src-supplier=IHS+Markit, ComponentLink2Description=https://datasheet.ciiva.com/11794/0900766b80deaa91-11794477.pdf?src-supplier=Rs, ComponentLink2URL=https://datasheet.ciiva.com/11794/0900766b80deaa91-11794477.pdf?src-supplier=Rs, ComponentLink3Description=https://datasheet.ciiva.com/14593/70096008-14593753.pdf?src-supplier=Allied+Electronics, ComponentLink3URL=https://datasheet.ciiva.com/14593/70096008-14593753.pdf?src-supplier=Allied+Electronics, Height=4mm, JESD-609 Code=e3, Length=7.3mm, Manufacturer Part Number=T530X337M010ATE004, Mounting Technology="Surface Mount", Packaging="Tape and Reel", Pins=2, Polarity=Polarized, Pricing="1=7.14, 10=6.191, 50=5.5562, 100=4.8259 (USD)", Reach SVHC Compliant=Yes, RoHS=Yes, RoHS Compliant=Yes, Stock=3973, Supplier=Digikey, Tan Delta=0.08, Terminal Finish=Tin, Termination="J BEND", Tolerance (fill in as +-)=20%, Width=4.3mm
C11: library part C0805F103K5RACTU, "Ceramic Capacitor, Ceramic, 50V, 10% +Tol, 10% -Tol, X7R, -/+15ppm/Cel TC, 0.01uF, 0805", Capacitor Type=Ceramic, Case/Package=0805, Manufacturer=KEMET, Max Operating Temperature=125°C, Min Operating Temperature=-55°C, Package Style=SMTMeter, Rated DC Voltage (URdc)=50V, Supplier Part Number=399-C0805F103K5RAC7800CT-ND, Temperature Characteristics Code=X7R, Tolerance  (fill in as +-)=10%, Category="Ceramic Capacitors", ComponentLink1Description=https://datasheet.ciiva.com:443/pdfs/VipMasterIC/IC/KEME/KEMES00768/KEMES00768-1.pdf?src-supplier=IHS+Markit, ComponentLink1URL=https://datasheet.ciiva.com:443/pdfs/VipMasterIC/IC/KEME/KEMES00768/KEMES00768-1.pdf?src-supplier=IHS+Markit, ComponentLink2Description=https://datasheet.ciiva.com/146/docfinderpartnumber-c0805f103k5ractu-146278.pdf?src-supplier=Digikey, ComponentLink2URL=https://datasheet.ciiva.com/146/docfinderpartnumber-c0805f103k5ractu-146278.pdf?src-supplier=Digikey, ComponentLink3Description=https://datasheet.ciiva.com/7842/48829-7842408.pdf?src-supplier=Element14, ComponentLink3URL=https://datasheet.ciiva.com/7842/48829-7842408.pdf?src-supplier=Element14, ComponentLink4Description=https://datasheet.ciiva.com/7842/48829-7842407.pdf?src-supplier=Element14, ComponentLink4URL=https://datasheet.ciiva.com/7842/48829-7842407.pdf?src-supplier=Element14, Dielectric Material=Ceramic, Height=0.9mm, JESD-609 Code=e3, Length=2mm, Manufacturer Part Number=C0805F103K5RACTU, Packaging="Tape and Reel", Pins=2, Pricing="1=0.35, 10=0.225, 50=0.158, 100=0.1276, 500=0.09478, 1000=0.08293 (USD)", Reach SVHC Compliant=Yes, RoHS=Yes, RoHS Compliant=Yes, Stock=10399, Supplier=Digikey, Terminal Finish=Nickel, Tolerance (fill in as +-)=10%, Width=1.25mm
J1 J2 J3 J4 J5 J6: library part PAD_WITH_HOLE_4MMx1MM5, "Pad with a hole 4mm x 1.5mm"
L1: library part DR125-3R3-R, "Inductor Power Shielded Drum Core 3.3uH 20% 100KHz Ferrite 9.26A 6.3mOhm DCR T/R", Manufacturer="Eaton Cooper", Supplier Part Number=513-1529-1-ND, Category="Fixed Inductors", Manufacturer Part Number=DR125-3R3-R, Pricing="1=1.21, 10=1.02, 25=0.9276, 50=0.8718, 100=0.7234, 250=0.66776 (USD)", RoHS=Yes, Stock=27706, Supplier=Digikey
L2: library part DR125-2R2-R, "General Purpose Inductor, 2.2uH, 20%, 1 Element, Ferrite-Core, SMD, 4949", Case/Size Code=4949, DC Resistance (DCR)=4.5mR, Inductor Application="DC-DC CONVERTER", Inductor Type="GENERAL PURPOSE INDUCTOR", Manufacturer="Eaton Cooper", Max Current Rating=10.9A, Max Operating Temperature=125°C, Min Operating Temperature=-40°C, Package Height=6mm, Package Length=12.5mm, Package Style=SMTMeter, Supplier Part Number=513-1662-1-ND, Test Frequency=100kHz, Tolerance=20%, Category="Fixed Inductors", Channels=1, ComponentLink1Description=https://datasheet.ciiva.com:443/pdfs/VipMasterIC/IC/ETON/ETON-S-A0008372465/ETON-S-A0008372465-1.pdf?src-supplier=IHS+Markit, ComponentLink1URL=https://datasheet.ciiva.com:443/pdfs/VipMasterIC/IC/ETON/ETON-S-A0008372465/ETON-S-A0008372465-1.pdf?src-supplier=IHS+Markit, ComponentLink2Description=https://datasheet.ciiva.com/14667/0900766b8116a153-14667792.pdf?src-supplier=Rs, ComponentLink2URL=https://datasheet.ciiva.com/14667/0900766b8116a153-14667792.pdf?src-supplier=Rs, ComponentLink3Description=https://datasheet.ciiva.com/26926/getdatasheetpartid-571249-26926912.pdf?src-supplier=Verical, ComponentLink3URL=https://datasheet.ciiva.com/26926/getdatasheetpartid-571249-26926912.pdf?src-supplier=Verical, ComponentLink4Description=https://datasheet.ciiva.com/8004/87246-8004874.pdf?src-supplier=Element14, ComponentLink4URL=https://datasheet.ciiva.com/8004/87246-8004874.pdf?src-supplier=Element14, Construction="Magnetic Shielded", Core Material=Ferrite, Inductance-Nom (L)=2.2uH, JESD-609 Code=e3, Manufacturer Part Number=DR125-2R2-R, Package Width=12.5mm, Packaging="Tape and Reel", Pins=2, Pricing="1=1.21, 10=1.02, 25=0.9276, 50=0.8718, 100=0.7234, 250=0.6678 (USD)", Reach SVHC Compliant=Yes, RoHS=Yes, RoHS Compliant=Yes, Shape/Size Description="RECTANGULAR PACKAGE", Shielding=Shielded, Stock=2132, Supplier=Digikey, Surface Mount=Yes, Terminal Finish=Nickel, Terminal Placement="Dual Ended", Termination="One Surface"
Q1 Q2: "Small Signal Field-Effect Transistor, 5.8A I(D), 30V, 2-Element, N-Channel, Silicon, Metal-oxide Semiconductor FET", Drain Current-Max (ID)=5.8A, Drain-source On Resistance-Max=18.5mR, DS Breakdown Voltage-Min=30V, Manufacturer="Vishay Siliconix", Max Operating Temperature=150°C, Operating Mode="ENHANCEMENT MODE", Package Body Material=Plastic, Package Shape=Rectangular, Package Style="SMALL OUTLINEMeter", Peak Reflow Temperature (Cel)=260°C, Supplier Part Number=SI4816BDY-T1-E3DKR-ND, Time @ Peak Reflow Temperature-Max (s)=40s, Category=MOSFETs, ComponentLink1Description=https://datasheet.ciiva.com:443/pdfs/VipMasterIC/IC/SILX/SILXS27103/SILXS25943-1.pdf?src-supplier=IHS+Markit, ComponentLink1URL=https://datasheet.ciiva.com:443/pdfs/VipMasterIC/IC/SILX/SILXS27103/SILXS25943-1.pdf?src-supplier=IHS+Markit, ComponentLink2Description=https://datasheet.ciiva.com/7710/si4816bd-7710449.pdf?src-supplier=Element14, ComponentLink2URL=https://datasheet.ciiva.com/7710/si4816bd-7710449.pdf?src-supplier=Element14, ComponentLink3Description=https://datasheet.ciiva.com/928/si4816bd-928458.pdf?src-supplier=Digikey, ComponentLink3URL=https://datasheet.ciiva.com/928/si4816bd-928458.pdf?src-supplier=Digikey, ComponentLink4Description=https://datasheet.ciiva.com/928/si4816bd-928459.pdf?src-supplier=Digikey, ComponentLink4URL=https://datasheet.ciiva.com/928/si4816bd-928459.pdf?src-supplier=Digikey, ComponentLink5Description=https://datasheet.ciiva.com/928/si4816bd-928460.pdf?src-supplier=Digikey, ComponentLink5URL=https://datasheet.ciiva.com/928/si4816bd-928460.pdf?src-supplier=Digikey, ComponentLink6Description=https://datasheet.ciiva.com/11161/si4816bd-11161496.pdf?src-supplier=Avnet, ComponentLink6URL=https://datasheet.ciiva.com/11161/si4816bd-11161496.pdf?src-supplier=Avnet, ComponentLink7Description=https://datasheet.ciiva.com/16486/si4816bd-16486349.pdf?src-supplier=Future+Electronics, ComponentLink7URL=https://datasheet.ciiva.com/16486/si4816bd-16486349.pdf?src-supplier=Future+Electronics, FET Technology="METAL-OXIDE SEMICONDUCTOR", JESD-30 Code=R-PDSO-G8, JESD-609 Code=e3, Manufacturer Part Number=SI4816BDY-T1-E3, Moisture Sensitivity Level=1, Number of Elements=2, Pins=8, Polarity/Channel Type=N-CHANNEL, Pricing="1=1.58, 10=1.311, 100=1.0438, 500=0.88324, 1000=0.74942 (USD)", Qualification Status="Not Qualified", Reach SVHC Compliant=Yes, RoHS=Yes, RoHS Compliant=Yes, Supplier=Digikey, Surface Mount=Yes, Terminal Finish=Tin, Terminal Form="Gull Wing", Terminal Position=DUAL, Transistor Element Material=SILICON
R1 R2 R13 R15: library part AC0805JR-070RL, "Fixed Resistor, Metal Glaze/thick Film, 0.125W, 0ohm, Surface Mount, 0805", Case/Package=0805, Manufacturer=Yageo, Max Operating Temperature=155°C, Min Operating Temperature=-55°C, Package Height=0.5mm, Package Length=2mm, Package Shape=Rectangular, Package Style=SMTMeter, Package Width=1.25mm, Power=125mW, Rated Temperature=70°C, Resistor Type="FIXED RESISTOR", Supplier Part Number=YAG3755CT-ND, Category="Chip SMD Resistors", ComponentLink1Description=https://datasheet.ciiva.com:443/pdfs/VipMasterIC/IC/YAGO/YAGO-S-A0003597364/YAGO-S-A0003597364-1.pdf?src-supplier=IHS+Markit, ComponentLink1URL=https://datasheet.ciiva.com:443/pdfs/VipMasterIC/IC/YAGO/YAGO-S-A0003597364/YAGO-S-A0003597364-1.pdf?src-supplier=IHS+Markit, ComponentLink2Description=https://datasheet.octopart.com/AC0805JR-070RL-Yageo-datasheet-166720450.pdf?src-supplier=Future+Electronics, ComponentLink2URL=https://datasheet.octopart.com/AC0805JR-070RL-Yageo-datasheet-166720450.pdf?src-supplier=Future+Electronics, ComponentLink3Description=http://www.yageo.com/documents/recent/PYu-AC_51_RoHS_L_2.pdf?src-supplier=Mouser, ComponentLink3URL=http://www.yageo.com/documents/recent/PYu-AC_51_RoHS_L_2.pdf?src-supplier=Mouser, Construction=Chip, JESD-609 Code=e3, Manufacturer Part Number=AC0805JR-070RL, Mounting Technology="Surface Mount", Packaging="Tape and Reel", Pins=2, Pricing="1=0.1, 10=0.035, 25=0.0272, 50=0.0206, 100=0.0144, 250=0.0116, 500=0.00928, 1000=0.00683 (USD)", Reach SVHC Compliant=Yes, Reference Standard=AEC-Q200, RoHS=Yes, RoHS Compliant=Yes, Stock=70010, Supplier=Digikey, Technology="METAL GLAZE/THICK FILM", Terminal Finish=Nickel, Termination=Wraparound
R3: library part AC0805FR-0710RL, "Fixed Resistor, Metal Glaze/thick Film, 0.125W, 10ohm, 150V, 1% +/-Tol, 200ppm/Cel, Surface Mount, 0805", Case/Package=0805, Manufacturer=Yageo, Max Operating Temperature=155°C, Min Operating Temperature=-55°C, Package Height=0.5mm, Package Length=2mm, Package Shape=Rectangular, Package Style=SMTMeter, Package Width=1.25mm, Power=125mW, Rated Temperature=70°C, Resistor Type="FIXED RESISTOR", Supplier Part Number=YAG3690CT-ND, Temperature Coefficient=200ppm/°C, Tolerance=1%, Working Voltage=150V, Additional Feature="LASER TRIMMABLE", Category="Chip SMD Resistors", ComponentLink1Description=https://datasheet.ciiva.com:443/pdfs/VipMasterIC/IC/YAGO/YAGO-S-A0003597364/YAGO-S-A0003597364-1.pdf?src-supplier=IHS+Markit, ComponentLink1URL=https://datasheet.ciiva.com:443/pdfs/VipMasterIC/IC/YAGO/YAGO-S-A0003597364/YAGO-S-A0003597364-1.pdf?src-supplier=IHS+Markit, ComponentLink2Description=http://www.mouser.com/ds/2/447/yageodocoutput-1111992.pdf?src-supplier=Mouser, ComponentLink2URL=http://www.mouser.com/ds/2/447/yageodocoutput-1111992.pdf?src-supplier=Mouser, ComponentLink3Description=http://www.yageo.com/NewPortal/yageodocoutput?fileName=/pdf/R-Chip/PYu-AC_51_RoHS_L_6.pdf&src-supplier=Digikey, ComponentLink3URL=http://www.yageo.com/NewPortal/yageodocoutput?fileName=/pdf/R-Chip/PYu-AC_51_RoHS_L_6.pdf&src-supplier=Digikey, ComponentLink4Description=https://www.yageo.com/upload/media/product/productsearch/datasheet/rchip/PYu-AC_51_RoHS_L_7.pdf?src-supplier=Digikey, ComponentLink4URL=https://www.yageo.com/upload/media/product/productsearch/datasheet/rchip/PYu-AC_51_RoHS_L_7.pdf?src-supplier=Digikey, ComponentLink5Description=https://datasheet.octopart.com/AC0805FR-0710RL-Yageo-datasheet-151884373.pdf?src-supplier=Future+Electronics, ComponentLink5URL=https://datasheet.octopart.com/AC0805FR-0710RL-Yageo-datasheet-151884373.pdf?src-supplier=Future+Electronics, ComponentLink6Description=http://www.yageo.com/documents/recent/PYu-AC_51_RoHS_L_2_revised.pdf?src-supplier=Future+Electronics, ComponentLink6URL=http://www.yageo.com/documents/recent/PYu-AC_51_RoHS_L_2_revised.pdf?src-supplier=Future+Electronics, ComponentLink7Description=https://datasheet.octopart.com/AC0805FR-0710RL-Yageo-datasheet-159083007.pdf?src-supplier=TME, ComponentLink7URL=https://datasheet.octopart.com/AC0805FR-0710RL-Yageo-datasheet-159083007.pdf?src-supplier=TME, Construction=Chip, JESD-609 Code=e3, Manufacturer Part Number=AC0805FR-0710RL, Mounting Technology="Surface Mount", Packaging="Tape and Reel", Pins=2, Pricing="1=0.11, 10=0.052, 50=0.0338, 100=0.0286, 500=0.02014, 1000=0.01754 (USD)", Reach SVHC Compliant=Yes, Reference Standard=AEC-Q200, RoHS=Yes, RoHS Compliant=Yes, Stock=200638, Supplier=Digikey, Technology="METAL GLAZE/THICK FILM", Terminal Finish=Nickel, Termination=Wraparound
R4 R5: library part AC0805FR-071RL, "Fixed Resistor, Metal Glaze/thick Film, 0.125W, 1ohm, 150V, 1% +/-Tol, 200ppm/Cel, Surface Mount, 0805", Case/Package=0805, Manufacturer=Yageo, Max Operating Temperature=155°C, Min Operating Temperature=-55°C, Package Height=0.5mm, Package Length=2mm, Package Shape=Rectangular, Package Style=SMTMeter, Package Width=1.25mm, Power=125mW, Rated Temperature=70°C, Resistor Type="FIXED RESISTOR", Supplier Part Number=YAG3705CT-ND, Temperature Coefficient=200ppm/°C, Tolerance=1%, Working Voltage=150V, Additional Feature="LASER TRIMMABLE", Category="Chip SMD Resistors", ComponentLink1Description=https://datasheet.ciiva.com:443/pdfs/VipMasterIC/IC/YAGO/YAGO-S-A0003597364/YAGO-S-A0003597364-1.pdf?src-supplier=IHS+Markit, ComponentLink1URL=https://datasheet.ciiva.com:443/pdfs/VipMasterIC/IC/YAGO/YAGO-S-A0003597364/YAGO-S-A0003597364-1.pdf?src-supplier=IHS+Markit, ComponentLink2Description=https://datasheet.ciiva.com/12576/pyu-ac-51-rohs-l-2-12576553.pdf?src-supplier=Mouser, ComponentLink2URL=https://datasheet.ciiva.com/12576/pyu-ac-51-rohs-l-2-12576553.pdf?src-supplier=Mouser, Construction=Chip, JESD-609 Code=e3, Manufacturer Part Number=AC0805FR-071RL, Mounting Technology="Surface Mount", Packaging="Tape and Reel", Pins=2, Pricing="1=0.11, 10=0.052, 50=0.0338, 100=0.0286, 500=0.02014, 1000=0.01754 (USD)", Reach SVHC Compliant=Yes, Reference Standard=AEC-Q200, RoHS=Yes, RoHS Compliant=Yes, Stock=74838, Supplier=Digikey, Technology="METAL GLAZE/THICK FILM", Terminal Finish=Nickel, Termination=Wraparound
R6 R7 R9 R10: library part AC0805FR-07200KL, "Fixed Resistor, Metal Glaze/thick Film, 0.125W, 200000ohm, 150V, 1% +/-Tol, 100ppm/Cel, Surface Mount, 0805", Case/Package=0805, Manufacturer=Yageo, Max Operating Temperature=155°C, Min Operating Temperature=-55°C, Package Height=0.5mm, Package Length=2mm, Package Shape=Rectangular, Package Style=SMTMeter, Package Width=1.25mm, Power=125mW, Rated Temperature=70°C, Resistor Type="FIXED RESISTOR", Supplier Part Number=YAG3706CT-ND, Temperature Coefficient=100ppm/°C, Tolerance=1%, Working Voltage=150V, Additional Feature="LASER TRIMMABLE", Category="Chip SMD Resistors", ComponentLink1Description=https://datasheet.ciiva.com:443/pdfs/VipMasterIC/IC/YAGO/YAGO-S-A0003597364/YAGO-S-A0003597364-1.pdf?src-supplier=IHS+Markit, ComponentLink1URL=https://datasheet.ciiva.com:443/pdfs/VipMasterIC/IC/YAGO/YAGO-S-A0003597364/YAGO-S-A0003597364-1.pdf?src-supplier=IHS+Markit, ComponentLink2Description=http://www.mouser.com/ds/2/447/yageodocoutput-1111992.pdf?src-supplier=Mouser, ComponentLink2URL=http://www.mouser.com/ds/2/447/yageodocoutput-1111992.pdf?src-supplier=Mouser, ComponentLink3Description=http://www.yageo.com/NewPortal/yageodocoutput?fileName=/pdf/R-Chip/PYu-AC_51_RoHS_L_6.pdf&src-supplier=Digikey, ComponentLink3URL=http://www.yageo.com/NewPortal/yageodocoutput?fileName=/pdf/R-Chip/PYu-AC_51_RoHS_L_6.pdf&src-supplier=Digikey, ComponentLink4Description=http://www.yageo.com/documents/recent/PYu-AC_51_RoHS_L_2.pdf?src-supplier=Future+Electronics, ComponentLink4URL=http://www.yageo.com/documents/recent/PYu-AC_51_RoHS_L_2.pdf?src-supplier=Future+Electronics, ComponentLink5Description=https://datasheet.octopart.com/AC0805FR-07200KL-Yageo-datasheet-151884373.pdf?src-supplier=Future+Electronics, ComponentLink5URL=https://datasheet.octopart.com/AC0805FR-07200KL-Yageo-datasheet-151884373.pdf?src-supplier=Future+Electronics, Construction=Chip, JESD-609 Code=e3, Manufacturer Part Number=AC0805FR-07200KL, Mounting Technology="Surface Mount", Packaging="Tape and Reel", Pins=2, Pricing="1=0.1, 10=0.031, 50=0.0198, 100=0.0166, 500=0.01152, 1000=0.00997 (USD)", Reach SVHC Compliant=Yes, Reference Standard=AEC-Q200, RoHS=Yes, RoHS Compliant=Yes, Stock=5432, Supplier=Digikey, Technology="METAL GLAZE/THICK FILM", Terminal Finish=Nickel, Termination=Wraparound
R8 R11: library part AC0805FR-0710KL, "Fixed Resistor, Metal Glaze/thick Film, 0.125W, 10000ohm, 150V, 1% +/-Tol, 100ppm/Cel, Surface Mount, 0805", Case/Package=0805, Manufacturer=Yageo, Max Operating Temperature=155°C, Min Operating Temperature=-55°C, Package Height=0.5mm, Package Length=2mm, Package Shape=Rectangular, Package Style=SMTMeter, Package Width=1.25mm, Power=125mW, Rated Temperature=70°C, Resistor Type="FIXED RESISTOR", Supplier Part Number=311-10KLGCT-ND, Temperature Coefficient=100ppm/°C, Tolerance=1%, Working Voltage=150V, Additional Feature="LASER TRIMMABLE", Category="Chip SMD Resistors", ComponentLink1Description=https://datasheet.ciiva.com:443/pdfs/VipMasterIC/IC/YAGO/YAGO-S-A0003597364/YAGO-S-A0003597364-1.pdf?src-supplier=IHS+Markit, ComponentLink1URL=https://datasheet.ciiva.com:443/pdfs/VipMasterIC/IC/YAGO/YAGO-S-A0003597364/YAGO-S-A0003597364-1.pdf?src-supplier=IHS+Markit, ComponentLink2Description=https://datasheet.ciiva.com/5558/pyu-ac-51-rohs-l-2-5558347.pdf?src-supplier=Mouser, ComponentLink2URL=https://datasheet.ciiva.com/5558/pyu-ac-51-rohs-l-2-5558347.pdf?src-supplier=Mouser, Construction=Chip, JESD-609 Code=e3, Manufacturer Part Number=AC0805FR-0710KL, Mounting Technology="Surface Mount", Packaging="Tape and Reel", Pins=2, Pricing="1=0.1, 10=0.031, 50=0.0198, 100=0.0166, 500=0.01152, 1000=0.00997 (USD)", Reach SVHC Compliant=Yes, Reference Standard=AEC-Q200, RoHS=Yes, RoHS Compliant=Yes, Stock=479935, Supplier=Digikey, Technology="METAL GLAZE/THICK FILM", Terminal Finish=Nickel, Termination=Wraparound
R12 R14 R16 R17 R18: library part RES
U1: "Dual Switching Controller, Current-mode, 500kHz Switching Freq-Max, BICMOS, PQCC32", Case/Package=HVQCCN, Frequency=500kHz, Manufacturer=Renesas, Max Operating Temperature=100°C, Max Supply Voltage=25V, Min Input Voltage=5.5V, Min Operating Temperature=-40°C, Nominal Output Voltage=1.05V, Nominal Supply Voltage=12V, Package Body Material=Plastic, Package Shape=Square, Package Style="CHIP CARRIER, HEAT SINK/SLUG, VERY THIN PROFILEMeter", Peak Reflow Temperature (Cel)=260°C, Supplier Part Number=968-ISL6236AIRZ, Temperature Grade=INDUSTRIAL, Time @ Peak Reflow Temperature-Max (s)=30s, Channels=1, ComponentLink1Description=https://datasheet.ciiva.com:443/pdfs/VipMasterIC/IC/RNCC/RNCC-S-A0005459175/RNCC-S-A0005459179-1.pdf?src-supplier=IHS+Markit, ComponentLink1URL=https://datasheet.ciiva.com:443/pdfs/VipMasterIC/IC/RNCC/RNCC-S-A0005459175/RNCC-S-A0005459179-1.pdf?src-supplier=IHS+Markit, ComponentLink2Description=https://datasheet.octopart.com/ISL6236AIRZ-Renesas-datasheet-138160199.pdf?src-supplier=Future+Electronics, ComponentLink2URL=https://datasheet.octopart.com/ISL6236AIRZ-Renesas-datasheet-138160199.pdf?src-supplier=Future+Electronics, ComponentLink3Description=http://www.intersil.com/content/dam/Intersil/documents/isl6/isl6236a.pdf?src-supplier=Digikey, ComponentLink3URL=http://www.intersil.com/content/dam/Intersil/documents/isl6/isl6236a.pdf?src-supplier=Digikey, Control Mode=CURRENT-MODE, Control Technique="PULSE WIDTH MODULATION", Height - Seated (Max)=1mm, JESD-30 Code=S-PQCC-N32, JESD-609 Code=e3, Length=5mm, Manufacturer Part Number=ISL6236AIRZ, Moisture Sensitivity Level=3, Pins=32, Pricing="1=6.36, 10=5.75, 50=4.77, 100=4.55, 1000=3.47, 10000=3.47 (USD)", Reach SVHC Compliant=Yes, RoHS=Yes, RoHS Compliant=Yes, Stock=3133, Supplier=Mouser, Surface Mount=Yes, Switcher Configuration=BUCK, Technology=BICMOS, Terminal Finish=Tin, Terminal Form="No Lead", Terminal Pitch=0.5mm, Terminal Position=QUAD, Throw Configuration="DUAL SWITCHING CONTROLLER", Width=5mm

## Via types
v1: diameter 0.6, hole 0.3, L1 to L6, tented both sides, 86 vias

## Nets (pads, with @x,y where several pads share a name; then routed paths per layer and width w, separated by ;. In a path a pad name is that pad's centre, name@x,y a point inside that pad or via, vN(x,y) a via of type N, cw(c..) or ccw(c..) an arc to the next point about the centre after c; other vN are vias at no path point)
+1V05: C10.1 J4.1 L2.2 | length 13.5
  L1 w0.2: L2.2 37.425,37 38.6,35.825 C10.1 J4.1
+1V5: C9.1 J3.1 L1.1 R12.2 U1.10 | length 20.5
  L1 w0.2: L1.1 L1.1@32.4,13.125 ; C9.1@37.425,13.125 C9.1 ; C9.1@38.7,14.2 C9.1 ; C9.1@38.7,14.4 C9.1
  L3 w1: v1(31.2,17.1) 32,17.1 37.9,11.2 v1(38.7,11.2)
  L6 w0.2: U1.10@26.265,22.585 26.265,22.246 26.661,21.85 26.754,21.85
  L6 w0.5: 26.754,21.85 26.754,21.757 29.311,19.2 30.7,19.2 31.2,18.7 R12.2 v1(31.2,17.1)
+5V_LDO: C1.2 R1.2 U1.7 | length 26.9
  L3 w1: v1(11.9,24.2) 21.414,24.2 22.114,24.9 27.3,24.9 v1(29.925,22.275)
  L6 w0.2: U1.7@27.415,23.735 27.831,23.735 28.7,22.866
  L6 w0.5: v1(11.9,24.2) R1.2@13.75,24.2 ; 28.7,22.866 28.7,21.7 28.817,21.583 29.6,21.583 C1.2@29.95,21.233 ; v1@29.9,22.3 29.95,22.25 C1.2@29.95,21.233 ; C1.2 C1.2@29.95,21.233
+5V_PVCC: C3.2 R1.1 R2.2 R3.1 U1.19 | length 13.5
  L6 w0.2: R1.1@15.75,24.5 R1.1 R1.1@15.933,24.383 ; R2.2@15.75,28.9 R2.2@15.85,29 ; 21.804,24.224 21.83,24.25 U1.19
  L6 w0.5: 16.9,25 19.5,25 20,24.5 20,23.804 20,23.596 C3.2 ; C3.2@20,23.604 20.2,23.804 21.384,23.804 21.804,24.224
  L6 w0.7: R1.1@15.75,24.5 R3.1 R2.2@15.75,28.9 ; R1.1@15.933,24.383 16.283,24.383 16.9,25
+5V_VCC: C4.2 R3.2 R8.2 R9.2 R10.2 R11.2 R13.2 R16.2 U1.2 U1.3 U1.20 | length 26.5
  L6 w0.2: v1(21.5,25.7) 21.577,25.623 21.577,25.305 22.132,24.75 U1.20 ; R16.2@27.15,37 v1(28.6,37) ; U1.3 28.55,25.75 28.667,25.867 28.667,26.832 28.7,26.865 ; U1.2 27.415,26.265 27.754,26.265 28,26.511 v1(28,28) ; v1(28.2,32.2) C4.2@30.05,32.2 ; R13.2 R13.2@28.9,16.15 ; R8.2@29.75,37 R8.2
  L6 w0.5: v1(12,26.6) R3.2 ; v1(12,31.3) R10.2@13.85,31.3 ; v1(12,33.8) R9.2@13.85,33.8 ; R11.2@24.3,15.8 24.3,15 v1(24.9,14.4) ; 28.7,26.865 28.7,30.85 C4.2 ; v1(28.9,14.3) R13.2 ; v1(29.6,39) 29.95,38.65 R8.2
+REF: C12.1 R14.2 U1.1 | length 11
  L6 w0.2: 27.3,28.269 27.25,28.219 27.25,27.927 27.258,27.919 27.258,26.765 27.273,26.75 U1.1@27.35,26.75 ; U1.1@27.521,26.75 U1.1@27.536,26.765
  L6 w0.5: 27.3,28.269 27.3,28.584 27.5,28.784 27.5,31.526 27.35,31.676 R14.2 29.95,34.7 C12.1
+VIN: C2.2 C5.2 C6.2 J1.1 Q1.8 Q2.8 R2.1 U1.6 | length 6
  L6 w0.2: v1(12.1,29) R2.1 R2.1@13.95,29 ; U1.6 28.55,24.25
  L6 w0.5: 28.55,24.25 29.1,23.7 C2.2@30.05,23.7 ; C2.2@30.233,23.883 30.973,24.623 31.096,24.623 31.173,24.7 v1(31.2,24.7)
+VREF3: C11.1 R15.2 U1.5 | length 30.8
  L6 w0.2: R15.2 27.433,39.483 27.77,39.483 ; U1.5 28.253,24.75 28.303,24.8 29.002,24.8 29.052,24.75 29.75,24.75 ; C11.1 30.05,26.65
  L6 w0.5: 29.75,24.75 30.05,25.05 C11.1
  L6 w0.9: 30.05,26.75 30.55,27.25
  L6 w1: 27.77,39.483 27.983,39.483 29.5,41 32.6,41 36.3,37.3 36.3,29.486 35.714,28.9 32.2,28.9 30.55,27.25
EN1: R11.1 U1.14 | length 4.7
  L6 w0.2: U1.14 24.25,18 R11.1
EN_LDO: R8.1 U1.4 | length 18.7
  L6 w0.2: U1.4 27.415,25.265 28.665,25.265 29.25,25.85 29.25,27.55 31.7,30 34.083,30 34.483,30.4 34.483,31.183 v1(34.5,31.2) 34.5,35.5 32.8,37.2 R8.1
FB1: R12.1 R13.1 R17.2 U1.11 | length 11.7
  L6 w0.2: U1.11 25.75,21.932 25.867,21.815 25.915,21.815
  L6 w0.5: 25.915,21.815 26.054,21.676 26.054,21.346 28.35,19.05 28.35,18.2 28.6,17.95 R13.1 29.2,17.95 29.45,17.7 29.45,17.5 30.9,16.05 R12.1 R17.2
GND: C1.1 C2.1 C3.1 C4.1 C5.1 C6.1 C9.2 C10.2 C11.2 C12.2 J2.1 J5.1 J6.1 Q1.2 Q1.3 Q2.2 Q2.3 R6.2 R7.2 R17.1 R18.1 U1.8 U1.21 U1.22 U1.29 U1.30 U1.33 | length 14.4
  L6 w0.2: U1.21 U1.33@24.75,25.25 ; U1.22 U1.33@24.25,25.75 ; v1(23.8,26.2) U1.33@24.25,25.75 ; v1(24.8,29.1) 24.8,29.066 25.25,28.616 U1.29 ; U1.33 U1.33@24.75,25.25 ; v1(25.5,29.4) 25.5,28.057 25.735,27.822 25.735,27.415 U1.30 ; U1.8 27.4,22.5 v1(27.8,22.1) ; U1.33@24.25,25.75 U1.33@24.75,25.25
  L6 w0.5: v1(24.5,32.6) R6.2@25.4,32.6 ; v1(26.6,15.15) R7.2 ; R18.1@27.6,41.7 v1(28.5,41.7) ; R17.1@33.9,18 v1(34.8,18)
  other v1: 10.823,10.705 10.823,11.705 11.78,11.824 10.823,12.705 10.823,13.705 11.768,14.248 11.768,15.518 39.22,17.458 38,17.5 13.743,18.945 40.5,19 13.743,19.945 40.5,20.5 34.119,20.524 13.743,20.945 34.137,21.345 38,22 39.5,22 18.5,22.5 17.727,22.52 32.875,23.071 23.8,23.9 26.3,23.9 32.893,23.891 32.991,25.514 26.3,26.2 33.009,26.334 39.22,27.958 38,28 40.5,29.5 40.5,31 32.982,31.679 33,32.5 38,32.5 39.5,32.5 32.415,33.35 31.594,33.368 10.978,33.522 10.978,34.522 11.935,34.641 10.978,35.522 10.978,36.522 11.923,37.065 11.923,38.335 19.4,43.1 19.4,44.1 19.4,45.1
LGATE1: Q1.4 U1.18 | length 22.8
  L1 w0.5: Q1.4@12.855,12.995 v1(14.223,12.995)
  L3 w1: v1@14.223,13.195 14.223,13.577 13.4,14.4 13.4,15.5 12.777,16.123 12.777,16.172 12.16,16.789 12.111,16.789 11.114,17.786 11.114,19.731 13.384,22 16.832,22 17.332,21.5 20,21.5 v1(21.5,23)
  L6 w0.2: v1(21.5,23) 21.946,23.446 21.946,23.512 22.169,23.735 22.585,23.735 U1.18
LGATE2: Q2.4 U1.23 | length 16.9
  L1 w0.5: Q2.4@13.173,35.795 v1(14.423,35.795)
  L3 w1: v1(14.423,35.795) 14.423,29.977 17.9,26.5 v1(20.6,26.5)
  L6 w0.2: v1(20.6,26.5) 20.677,26.577 21.185,26.577 21.208,26.6 21.525,26.6 21.875,26.25 U1.23
NetC7_2: C7.2 R4.1 | length 2.5
  L6 w0.2: R4.1 18.45,18.7 C7.2
NetC8_1: C8.1 R5.2 | length 2.4
  L6 w0.2: C8.1 18.15,30.05 R5.2
NetR4_2: R4.2 U1.17 | length 3.3
  L6 w0.2: R4.2 20.433,21.183 20.883,21.183 22.6,22.9 U1.17
NetR5_1: R5.1 U1.24 | length 3
  L6 w0.2: R5.1 20.05,27.7 20.3,27.45 21.375,27.45 22.075,26.75 U1.24
NetR6_1: R6.1 U1.31 | length 3.7
  L6 w0.2: R6.1 25.85,30.7 26.1,30.45 26.1,29.151 26,29.051 26,28.122 26.235,27.887 26.235,27.415 U1.31
NetR7_1: R7.1 U1.12 | length 5.2
  L6 w0.2: U1.12 25.25,21.703 25.504,21.449 25.504,19.996 26.6,18.9 R7.1
PHASE1: C7.1 L1.2 Q1.5 Q1.6 Q1.7 U1.16 | length 11.4
  L1 w0.2: L1.2@22.13,13.195 L1.2
  L3 w1: v1(19.5,13.2) 20.425,14.125 v1(20.425,17.025)
  L6 w0.2: 22.8,22.1 22.8,22.15 23.05,22.4 23.235,22.4 23.25,22.415 U1.16
  L6 w0.5: v1@20.4,17 v1(20.425,17.025) 20.45,17.05 C7.1 20.549,18.699 20.549,19.662 21.15,20.264 21.15,20.45 22.8,22.1
PHASE2: C8.2 L2.1 Q2.5 Q2.6 Q2.7 U1.25 | length 17
  L1 w0.2: Q2.7@18.227,38.335 18.227,37.065 18.227,35.795 v1(19.674,35.795) 21.12,35.795 L2.1
  L3 w1: v1(19.674,35.795) 19.9,35.569 v1(19.9,31.3)
  L6 w0.2: v1(19.9,31.3) 19.9,30.2 C8.2 ; 22.924,27.787 23.048,27.787 U1.25@23.235,27.6
  L6 w0.5: C8.2@20.15,29.95 21.796,28.304 21.796,28.267 22.276,27.787 22.924,27.787
POK1: R10.1 U1.13 U1.27 | length 33.1
  L3 w0.254: v1(22.442,29.892) 22.486,29.847 22.853,29.847 24.227,28.473 25.877,28.473 30.752,23.598 30.752,21.826 28.399,19.473 26.147,19.473 24.97,20.65 24.97,21.134 v1(24.904,21.2)
  L6 w0.2: R10.1 15.85,31.7 16.1,31.95 18.133,31.95 18.137,31.954 20.379,31.954 v1(22.442,29.892) 24.25,28.083 U1.27 ; U1.13 24.75,21.462 24.904,21.308 v1(24.904,21.2)
POK2: R9.1 U1.28 | length 12.7
  L6 w0.2: R9.1 15.85,33.5 16.1,33.25 20.55,33.25 24.1,29.7 24.1,28.875 24.75,28.225 U1.28
RFIN2: R14.1 R15.1 R16.1 R18.2 U1.32 | length 17.8
  L6 w0.2: 26.55,28.35 26.75,28.15 U1.32
  L6 w0.5: R18.2 R15.1 R16.1 R14.1 25.35,34.6 25.35,34.3 24.643,33.593 24.432,33.593 23.75,32.911 23.75,32.289 24.276,31.763 26.274,31.763 26.8,31.236 26.8,29.074 26.55,28.824 26.55,28.35
UGATE1: Q1.1 U1.15 | length 14.2
  L1 w0.5: Q1.1 Q1.1@13.35,16.805 ; Q1.1@13.55,16.805 v1(14.223,16.805)
  L3 w1: v1@14.223,17.005 16.964,17.005 20.159,20.2 v1(22.9,20.2)
  L6 w0.2: v1(22.9,20.2) 23.8,21.1 23.8,22.178 23.765,22.213 23.765,22.585 U1.15
UGATE2: Q2.1 U1.26 | length 19.2
  L1 w0.5: Q2.1@13.173,39.605 v1(14.423,39.605)
  L3 w1: v1(14.423,39.605) 14.423,38.277 17.2,35.5 17.2,31.1 19.7,28.6 v1(22.6,28.6)
  L6 w0.2: v1(22.6,28.6) 22.677,28.523 23.042,28.523 23.735,27.831 23.735,27.415 U1.26
pads on no net: U1.9

## Polygon pours and split planes (outlines as drawn)
GND on L1 "GND_L01_P018" (solid, pour order 18): 13.654,16.066 13.654,13.855 13.745,13.763 13.72,13.738 12.223,13.738 12.223,11.538 12.02,11.336 11.322,11.336 11.322,10.442 11.168,10.288 10.328,10.288 10.328,14 11.131,14.803 11.131,15.601 11.584,16.054 12.265,16.054
GND on L1 "GND_L01_P017" (solid, pour order 17): 13.901,38.884 13.901,36.58 13.876,36.556 12.378,36.556 12.378,34.355 12.176,34.153 11.477,34.153 11.477,33.259 11.323,33.105 10.484,33.105 10.484,36.817 11.286,37.62 11.286,38.418 11.739,38.871 12.421,38.871
+1V05 on L1 "+1V05_L01_P003" (solid, pour order 3): 37,33.6 47.7,33.6 47.7,39.2 47.1,39.8 29.7,39.8 29.7,34.1 30,33.8
GND on L1 "GND_L01_P008" (solid, pour order 8): 37.147,22.312 37.176,22.341 41.069,22.341 41.069,17.191 40.925,17.047 37.118,17.047
GND on L1 "GND_L01_P007" (solid, pour order 7): 37.147,32.812 37.176,32.841 41.069,32.841 41.069,27.691 40.925,27.547 37.118,27.547
GND on L1 "GND_L01_P006" (solid, pour order 6): 15.643,18.545 13.143,18.545 13.143,21.545 15.643,21.545
GND on L1 "GND_L01_P005" (solid, pour order 5): 17.5,45.5 20,45.5 20,42.5 17.5,42.5
+VIN on L1 "+VIN_L01_P004" (solid, pour order 4): 17.212,16.719 17.333,16.4 19.6,16.4 19,22 17.5,22 17.333,22.083 15,25 15,26 17,26 20,26 21.5,24.5 28,24.5 29,23.5 32,23.5 32,24 32,24.5 32,26.5 30.5,26.5 29,28 22.5,28 20.5,30 12.5,30 10,32.5 10,37.5 14,41.5 16,41.5 17.5,40 17.5,39 19.167,39 18.5,41 16.5,43 16.5,45.5 12,45.5 7,45.5 7,37.5 3,33.5 3,29 8.5,23.5 14,23.5 15.5,22 16,21 17,20
+1V5 on L1 "+1V5_L01_P002" (solid, pour order 2): 37.3,16.4 48,16.4 48,10.8 47.4,10.2 30,10.2 30,15.9 30.3,16.2
PHASE1 on L1 "PHASE1_L01_P001" (solid, pour order 1): 17.3,16.1 24.6,16.1 24.6,10.3 24.3,10 20,10 17.3,12.7
PHASE2 on L1 "PHASE2_L01_P000" (solid, pour order 0): 17.449,40 24.253,40 24.253,34.145 24.239,34.1 20.4,34.1 20.4,34.2 19.1,35.5 17.549,35.5
GND on L6 "GND_L06_P016" (solid, pour order 16): 18.893,24.149 18.893,22.064 17.336,22.064 17.371,22.099 17.371,24.165
GND on L6 "GND_L06_P015" (solid, pour order 15): 32.518,35.482 32.774,35.226 32.774,33.008 31.217,33.008 31.252,33.043 31.252,35.526
GND on L6 "GND_L06_P013" (solid, pour order 13): 32.43,21.682 32.452,21.704 34.478,21.704 34.478,20 32.371,20
GND on L6 "GND_L06_P012" (solid, pour order 12): 31.186,24.229 31.208,24.251 33.234,24.251 33.234,22.693 33.199,22.729 31.133,22.729
GND on L6 "GND_L06_P011" (solid, pour order 11): 31.303,26.671 31.325,26.693 33.351,26.693 33.351,25.136 33.316,25.171 31.25,25.171
GND on L6 "GND_L06_P010" (solid, pour order 10): 31.293,32.837 31.315,32.859 33.342,32.859 33.342,31.302 33.307,31.337 31.241,31.337
+5V_VCC on L4 "+5V_VCC_L04_P019" (solid, pour order 19): 37.5,10 37.5,45 7.5,45 7.5,10
GND on L5 (split plane): 49.49,0.51 0.51,0.51 0.51,49.49 49.49,49.49
GND on L2 (split plane): 49.49,0.51 0.51,0.51 0.51,49.49 49.49,49.49

## Other copper
L1:
  text "DALVAC" at 2.254,3.254 h2

## Silkscreen, mask and mechanical layers (free items; w line width, h text height)
Top Overlay:
  text "OUT2" at 42.254,38.254 h1.52
  text "+VIN" at 1.954,32.654 h1.52
  text "GND" at 43.154,25.954 h1.52
  text "GND" at 43.154,22.454 h1.52
  text "GND" at 2.954,15.854 h1.52
  text "+OUT1" at 42.254,10.254 h1.52
Bottom Overlay:
  text "ISL6236A DEMO V1I1" at 41.65,46.35 h2
  text "1" at 28.546,26.954 h0.9
Top Solder:
  text "DALVAC" at 2.3,3.3 h2
Board outline:
  the board outline again, w0.5

## Text inside footprints (layer, text, board x,y; h text height)
Q1: Top Overlay "1" at 11.954,17.946 h0.9 r270
Q2: Top Overlay "1" at 12.154,40.746 h0.9 r270